# Altium PCB CCU-2.PcbDoc (part 1 of 3)
Units mm, origin at the board's own origin, x right, y up, seen from the top; angles counter-clockwise.
Board outline 52 x 56 mm, 4 copper layers (Top Layer, Int1 (GND), Int2 (PWR), Bottom Layer), stack 1.594 mm thick; 81 components, 50 nets, 261 pads, 97 vias.
Unrouted connection lines stored in the file: 64.
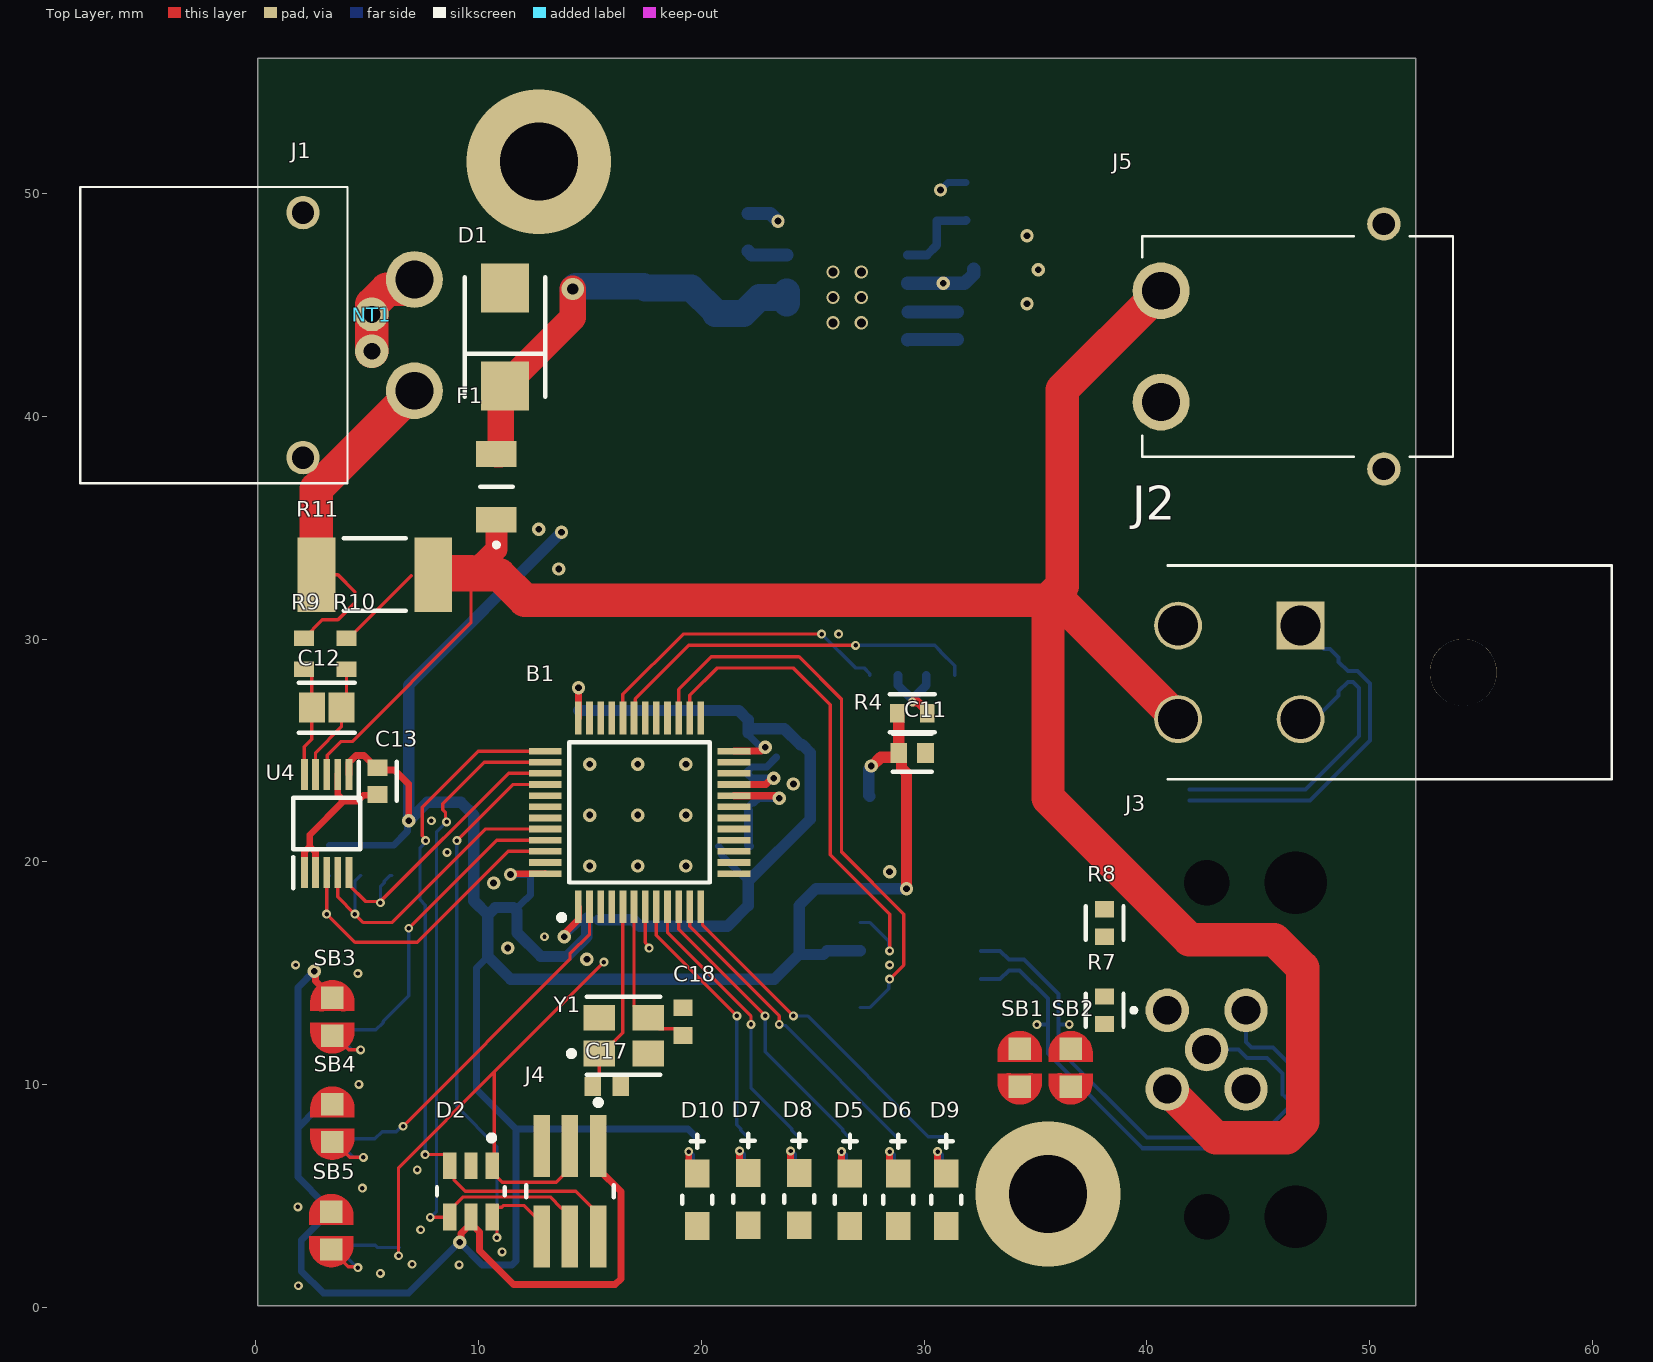
[diagram p0: Top Layer view]
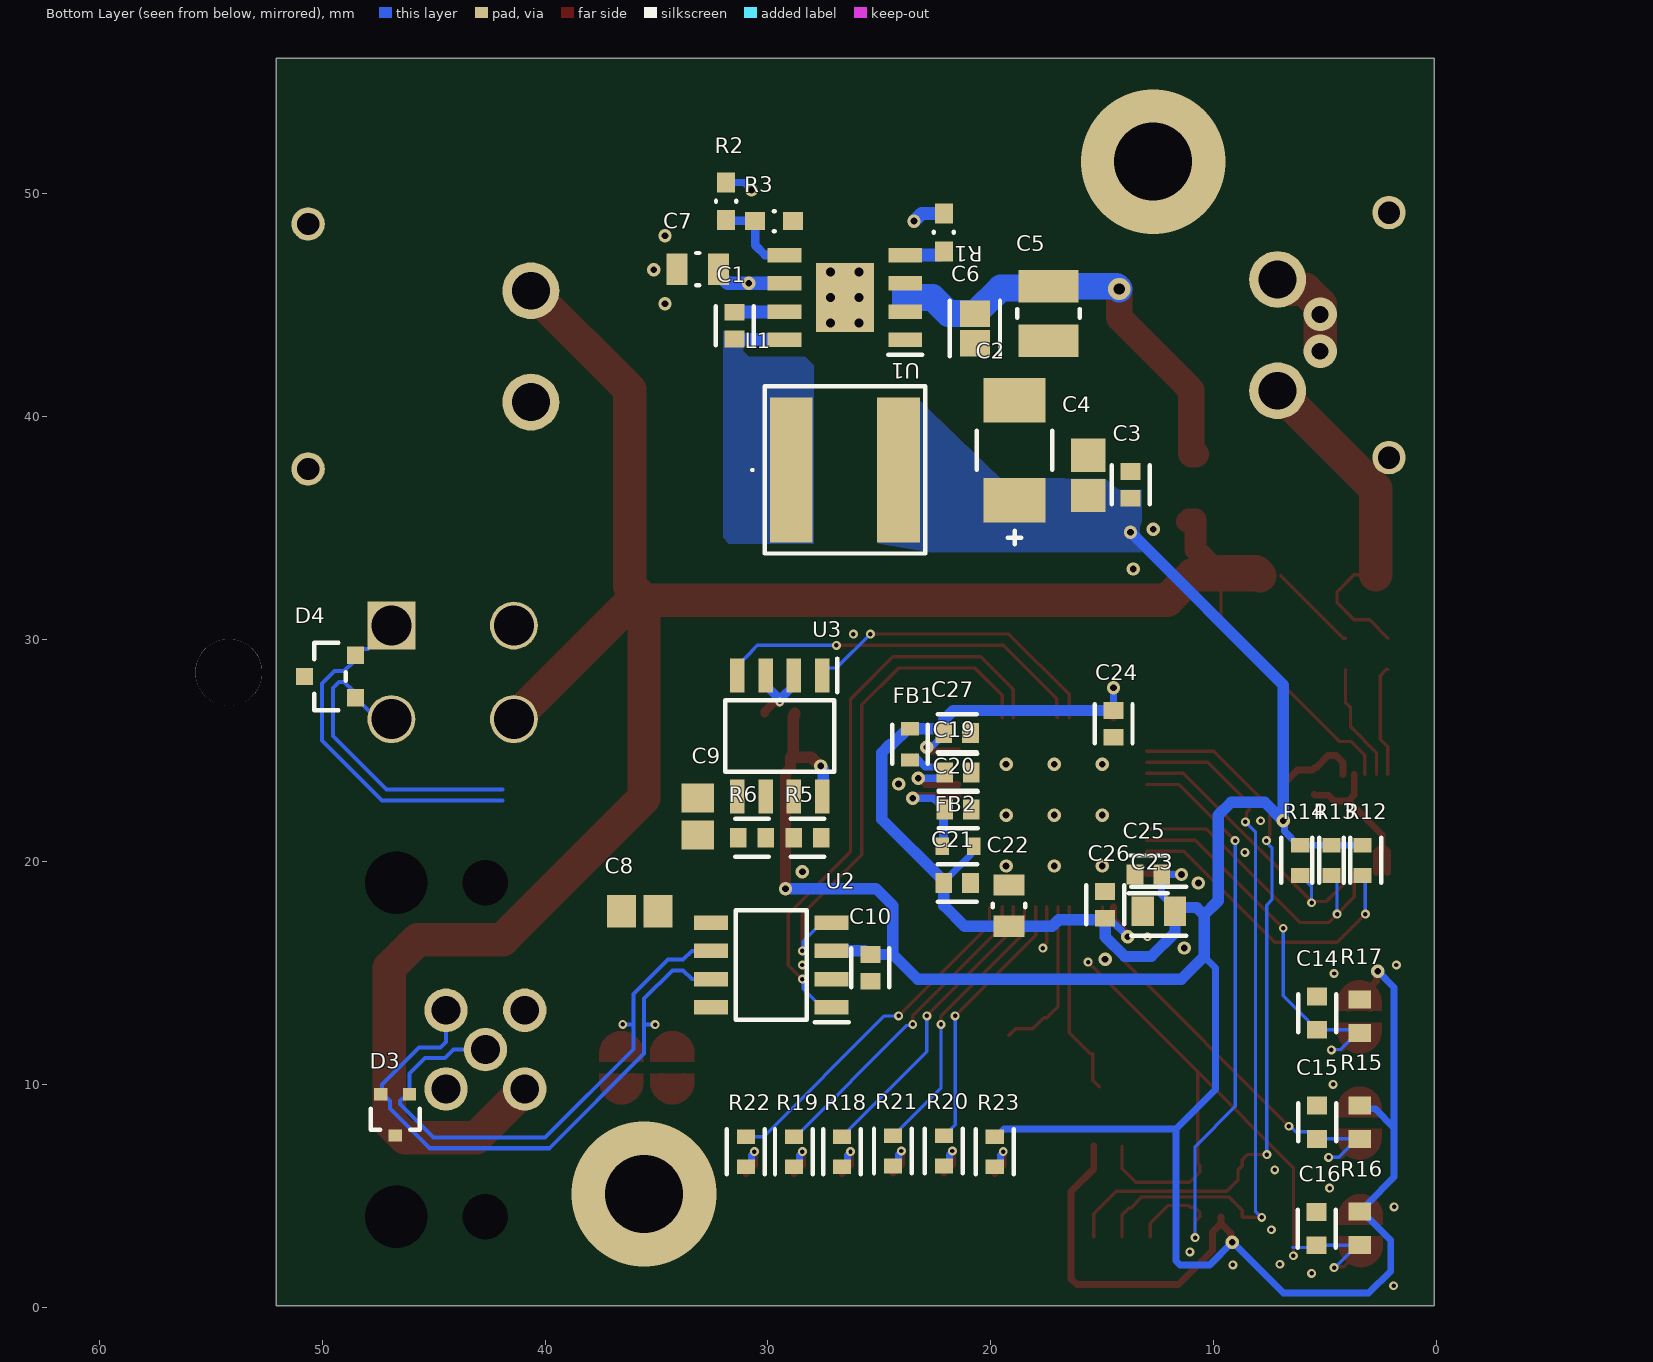
[diagram p1: Bottom Layer view, seen from below]
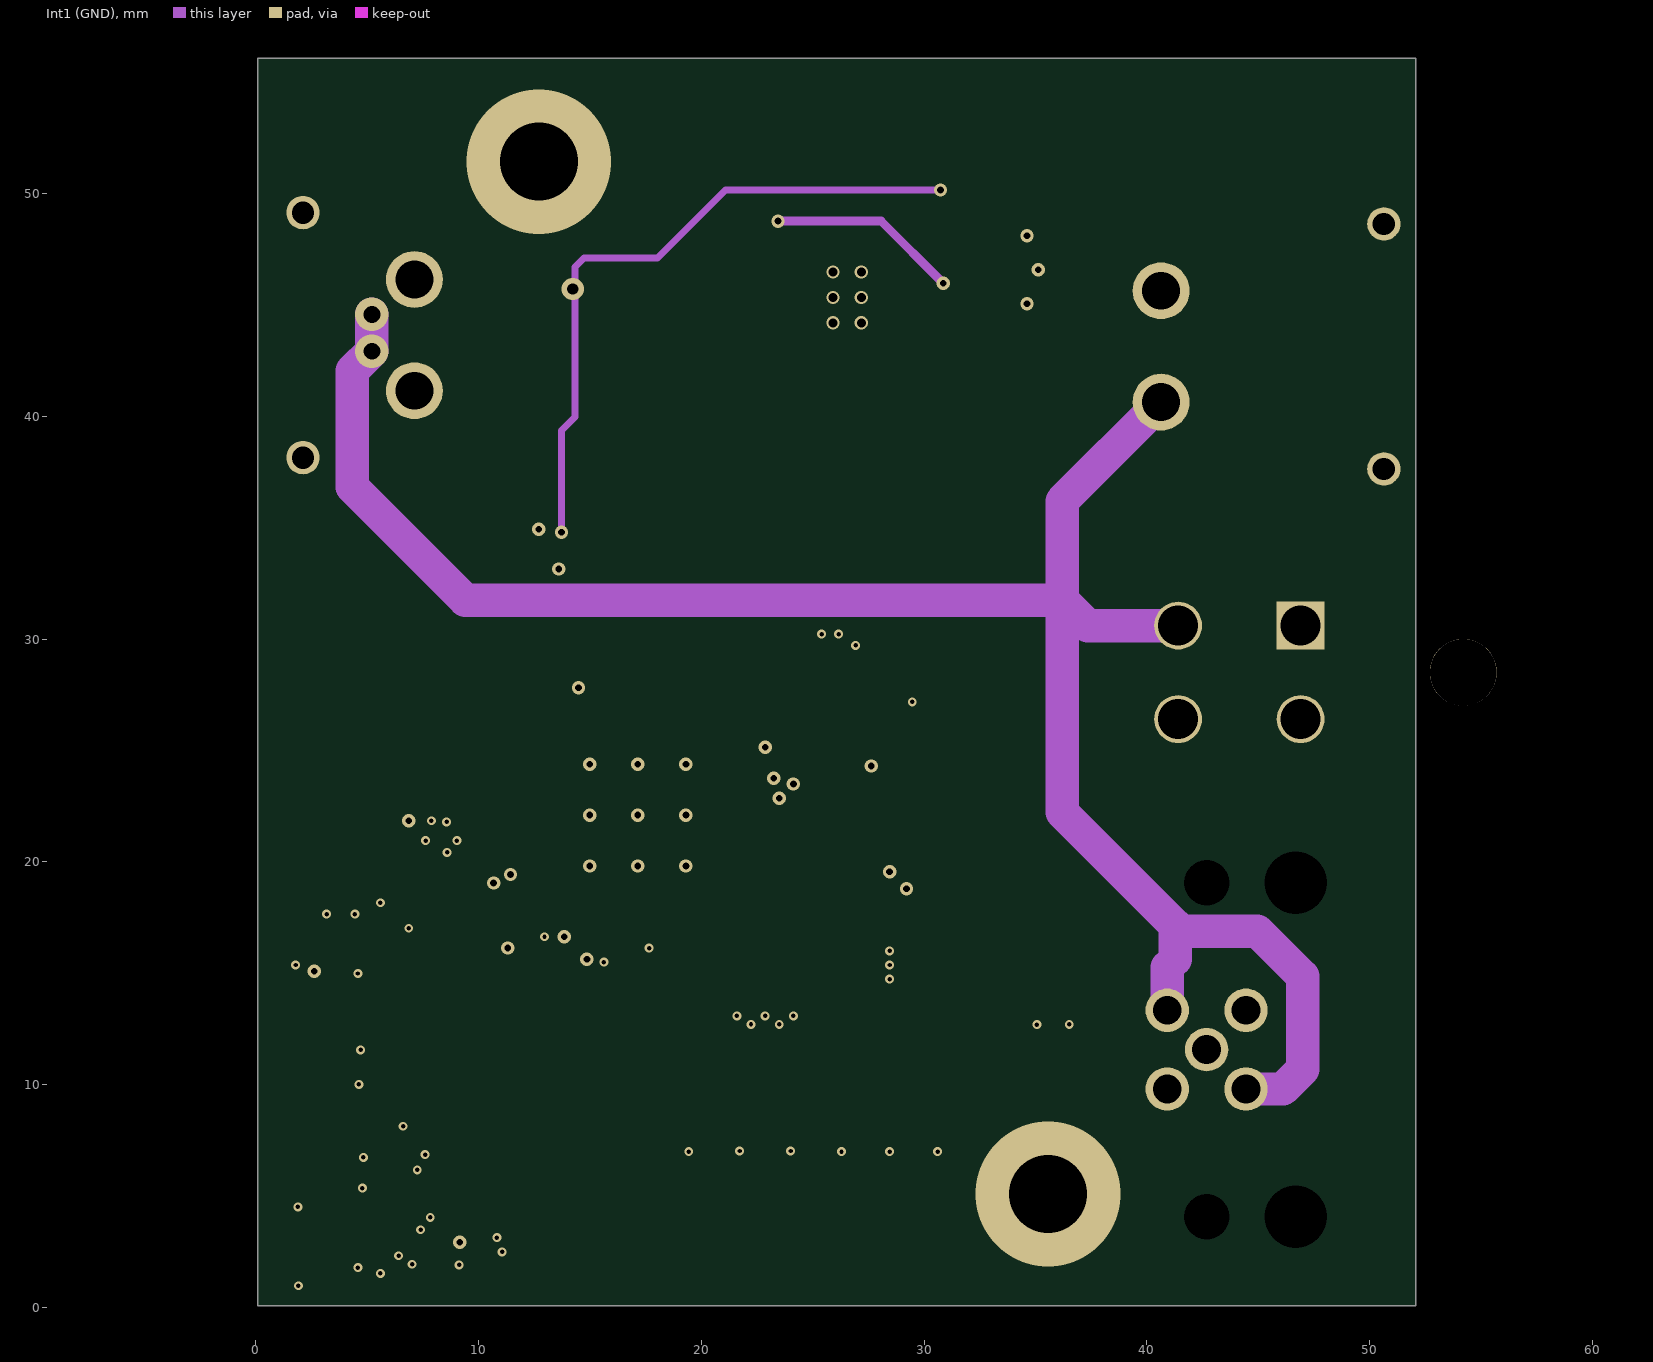
[diagram p2: Int1 (GND)]
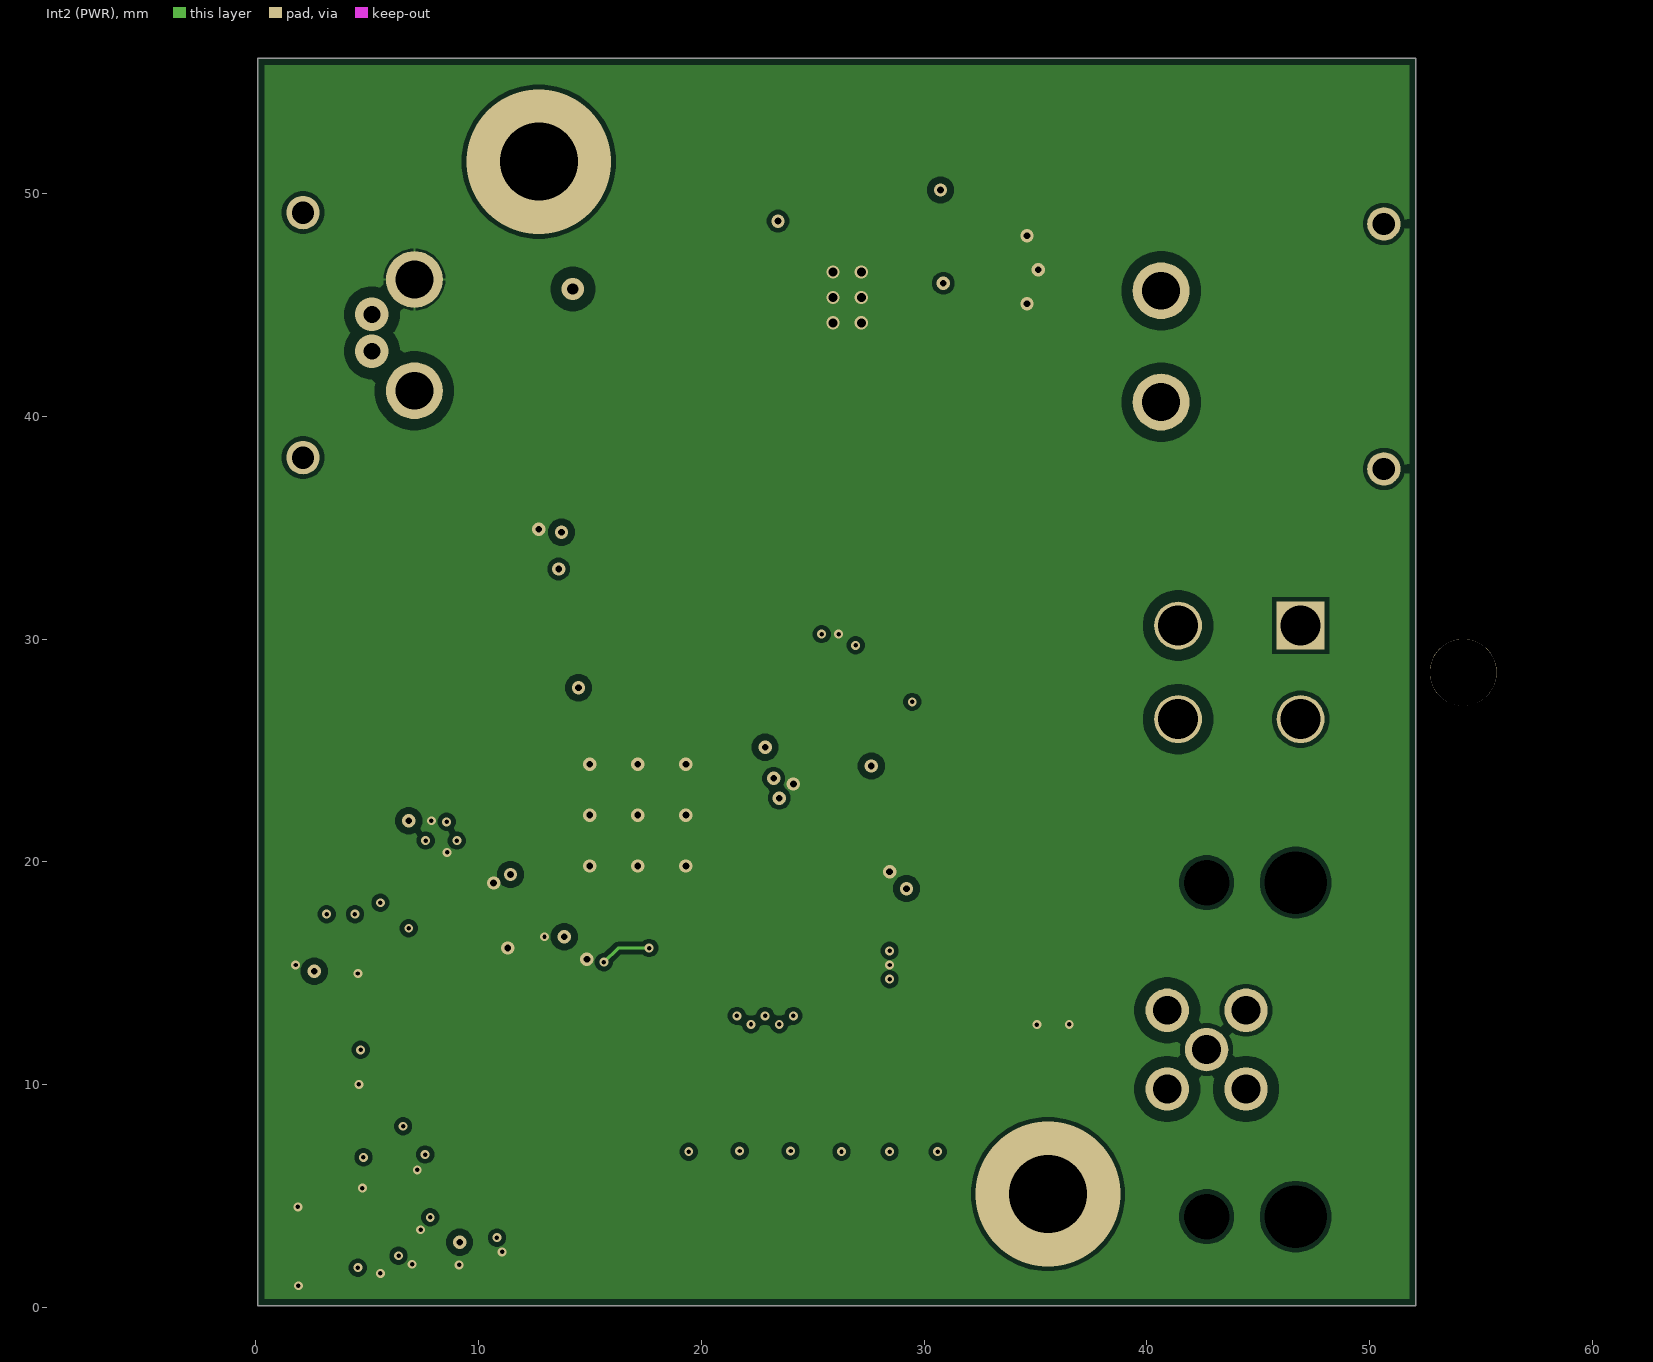
[diagram p3: Int2 (PWR)]
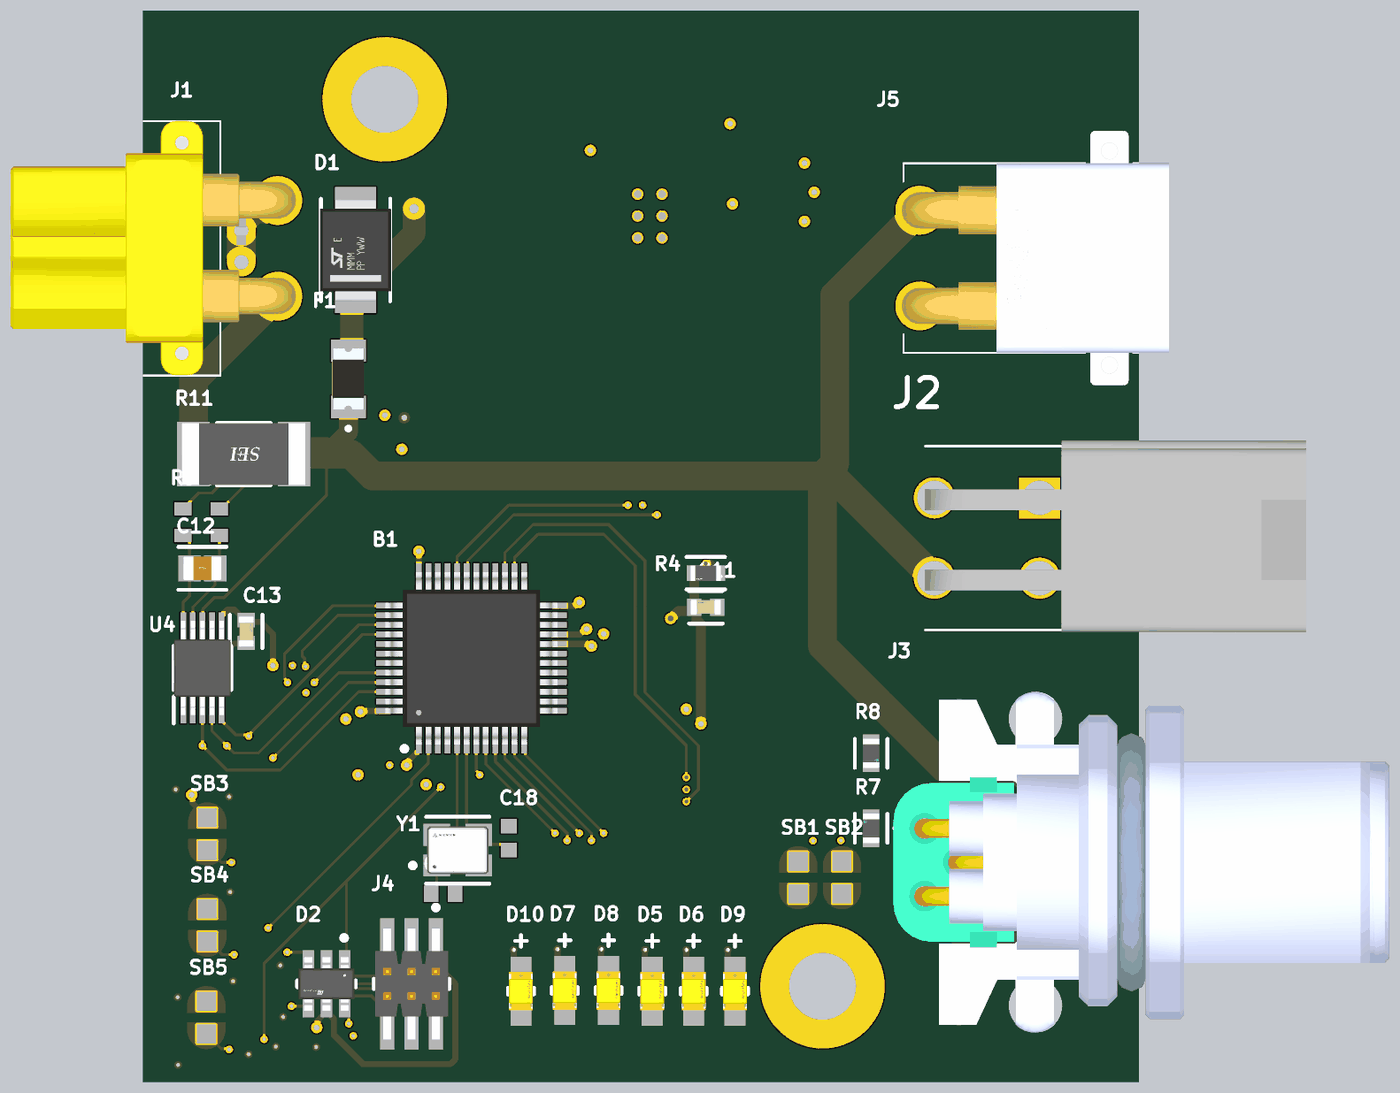
[diagram p5: 3D render of the assembled board from above, using the file's embedded part models]
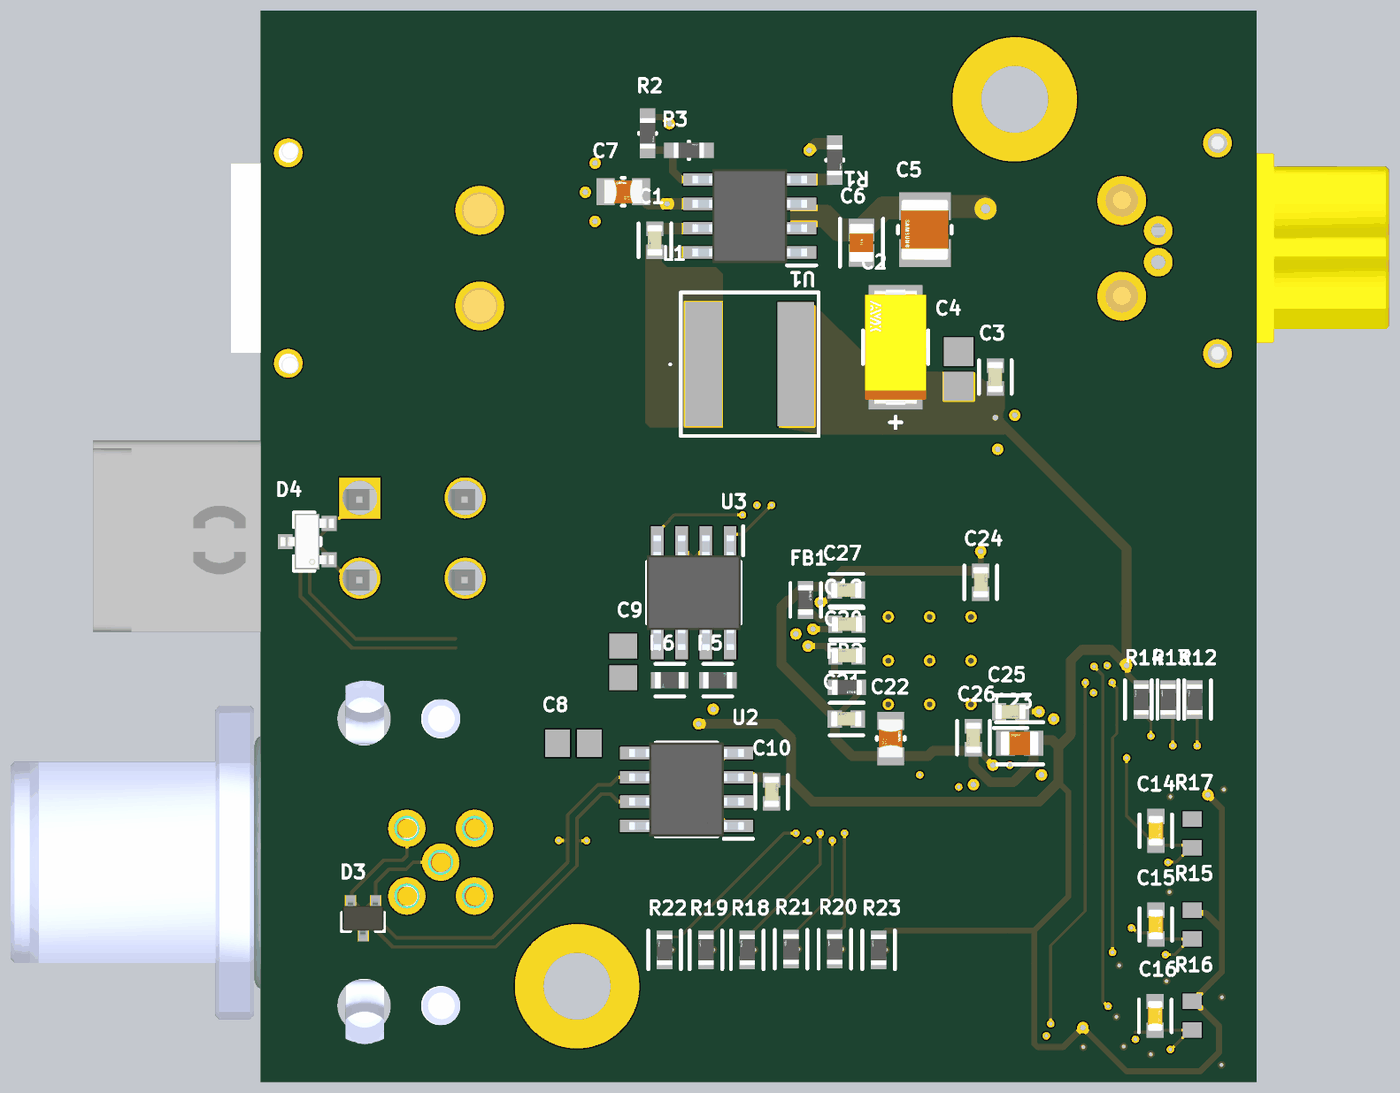
[diagram p6: 3D render of the assembled board from below, using the file's embedded part models]

## Layer stack, top to bottom
Top Solder: solder mask 0.0254, SM-001, Dk 4
Top Layer: signal copper 0.0351
Dielectric 1: prepreg 0.1067, PP-014, Dk 4.4
Dielectric 2: prepreg 0.1067, PP-014, Dk 4.4
Int1 (GND): signal copper 0.0152
Dielectric 3: core 1.0668, Core-042, Dk 4.6
Int2 (PWR): signal copper 0.0152
Dielectric 4: prepreg 0.1067, PP-014, Dk 4.4
Dielectric 5: prepreg 0.1067, PP-014, Dk 4.4
Bottom Layer: signal copper 0.0351
Bottom Solder: solder mask 0.0254, SM-001, Dk 4

## Board outline
0.077,0.077 0.077,56.077 52.077,56.077 52.077,0.077

## Design rules (kind name [scope] priority, off if disabled: settings)
BoardOutlineClearance [All] p1: gap=0.3 ignorepadtopadclearanceinfootprint=FALSE
Clearance "GND to 3V3 Clearence" [InNet('GND') vs InNet('+3V3')] p1: gap=0.3 ignorepadtopadclearanceinfootprint=TRUE
Clearance "GND to Power Clearance" [InNet('GND') vs (InNet('+12V')  OR InNet('+12V_EXT') OR InNet('+12V_ISO') OR InNet('GND_ISO'))] p2: gap=0.5 ignorepadtopadclearanceinfootprint=TRUE
Clearance "GND Clearance" [InNet('GND') vs Not ((InNet('+12V')  OR InNet('+12V_EXT')  OR InNet('+12V_ISO') OR InNet('GND_ISO')))] p3: gap=0.2 ignorepadtopadclearanceinfootprint=TRUE
Clearance "Power Clearence" [(InNet('+12V')  AND InNet('+12V_EXT')) vs InNet('+3V3')] p4: gap=0.4 ignorepadtopadclearanceinfootprint=TRUE
Clearance "Polygon to power Clearance" [InPolygon vs (InNet('+12V_EXT') OR InNet('+12V') OR  InNet('+3V3') OR InNet('GND'))] p5: gap=0.3 ignorepadtopadclearanceinfootprint=TRUE
ComponentClearance [All] p1: gap=0.102 collisioncheckmode=3 verticalgap=0.102 showdistances=TRUE
DiffPairsRouting "DIFF Class" [InDifferentialPairClass('DIFF')] p1: maxlimit=0.3 minlimit=0.28 mostfreqgap=0.3 toplayer_minwidth=0.18 toplayer_maxwidth=0.2 toplayer_prefwidth=0.2 midlayer1_minwidth=0.18 midlayer1_maxwidth=0.2 midlayer1_prefwidth=0.2 midlayer2_minwidth=0.18 midlayer2_maxwidth=0.2 midlayer2_prefwidth=0.2 bottomlayer_minwidth=0.18 bottomlayer_maxwidth=0.2 bottomlayer_prefwidth=0.2 maxuncoupledlength=12.7
DiffPairsRouting [All] p2: maxlimit=0.102 minlimit=0.102 mostfreqgap=0.102 toplayer_minwidth=0.102 toplayer_maxwidth=1816.048 toplayer_prefwidth=0.102 midlayer1_minwidth=0.102 midlayer1_maxwidth=1816.048 midlayer1_prefwidth=0.102 midlayer2_minwidth=0.102 midlayer2_maxwidth=1816.048 midlayer2_prefwidth=0.102 bottomlayer_minwidth=0.102 bottomlayer_maxwidth=1816.048 bottomlayer_prefwidth=0.102 maxuncoupledlength=12.7
Height [All] p1: minheight=0 maxheight=1816.048 prefheight=12.7
HoleSize [All] p1: absolutevalues=TRUE maxlimit=6.3 minlimit=0.2 maxpercent=80.000 minpercent=20.000
HoleToHoleClearance [All] p1: gap=0.25 allowstackedmicrovias=FALSE
MatchedLengths DiffPair_MatchedLengths [InDifferentialPairClass('DIFF')] p1: tolerance=25.4 checknetsindiffpair=FALSE checkdiffpairvsdiffpair=TRUE checkxsignals=TRUE checkothers=TRUE
MinimumAnnularRing [All] p1: minimumring=0.076
MinimumSolderMaskSliver [All] p1: minsoldermaskwidth=0
PlaneClearance [All] p1: clearance=0.3
PlaneConnect 3V3 [InNet('+3V3')] p1: planeconnectstyle=Direct reliefexpansion=0.508 reliefentries=4 reliefconductorwidth=0.254 reliefairgap=0.254
PlaneConnect PlaneConnectPowerPads [InPadClass('PowerPads')] p2: planeconnectstyle=Direct reliefexpansion=0.508 reliefentries=4 reliefconductorwidth=0.254 reliefairgap=0.254
PlaneConnect [All] p3: pad.planeconnectstyle=Relief pad.reliefexpansion=0.3 pad.reliefentries=4 pad.reliefconductorwidth=0.102 pad.reliefairgap=0.102 via.planeconnectstyle=Direct via.reliefexpansion=0.3 via.reliefentries=4 via.reliefconductorwidth=0.127 via.reliefairgap=0.127
PolygonConnect NetC1_1 [InNet('NetC1_1') vs InNet('NetC1_1')] p1: connectstyle=Direct reliefconductorwidth=0.254 reliefentries=4 polygonreliefangle="90 Angle" airgapwidth=0.254
PolygonConnect +3V3 [InNet('+3V3') vs InNet('+3V3')] p2: connectstyle=Direct reliefconductorwidth=0.254 reliefentries=4 polygonreliefangle="90 Angle" airgapwidth=0.254
PolygonConnect PolygonConnectPowerPads [All vs (InPadClass('PowerPads'))] p3: connectstyle=Direct reliefconductorwidth=0.254 reliefentries=4 polygonreliefangle="90 Angle" airgapwidth=0.254
PolygonConnect [All] p4: thpad.connectstyle=Relief thpad.reliefconductorwidth=0.102 thpad.reliefentries=4 thpad.polygonreliefangle="90 Angle" thpad.airgapwidth=0.102 smdpad.connectstyle=Relief smdpad.reliefconductorwidth=0.102 smdpad.reliefentries=4 smdpad.polygonreliefangle="90 Angle" smdpad.airgapwidth=0.102 via.connectstyle=Direct via.reliefconductorwidth=0.127 via.reliefentries=4 via.polygonreliefangle="90 Angle" via.airgapwidth=0.127
RoutingVias RoutingViasBasic [All] p1: holewidth=0.3 width=0.6 viastyle="Through Hole" minholewidth=0.2 minwidth=0.4 maxholewidth=0.5 maxwidth=1
SilkToSilkClearance [All] p1: silktosilkclearance=0
SilkToSolderMaskClearance [IsPad] p1: minsilkscreentomaskgap=0.102 clearancetoexposedcopper=TRUE
SolderMaskExpansion [All] p1: expansion=0.075 istentingtop=FALSE
SupplyNets "Schematic Supply Nets_5" [InNet('+12V_ISO')] p1: voltage=0.000
SupplyNets "Schematic Supply Nets_4" [InNet('GND_ISO')] p2: voltage=0.000
SupplyNets "Schematic Supply Nets_3" [InNet('+3V3')] p3: voltage=0.000
SupplyNets "Schematic Supply Nets_2" [InNet('+12V')] p4: voltage=0.000
SupplyNets "Schematic Supply Nets_1" [InNet('GND')] p5: voltage=0.000
SupplyNets "Schematic Supply Nets" [InNet('+12V_EXT')] p6: voltage=0.000
Width GND [InNet('GND')] p1: maxlimit=0.5 minlimit=0.2 preferedwidth=0.3
Width "3V3 Power" [InNet('+3V3')] p2: maxlimit=0.51 minlimit=0.31 preferedwidth=0.31
Width "12V Power" [(InNet('+12V') OR InNet('+12V_EXT'))] p3: maxlimit=1.2 minlimit=0.52 preferedwidth=0.62
Width Signal [Not (InNet('GND')) OR InNet('+12V') or InNet('+12V_EXT') or InNet('+3V3')] p4: maxlimit=0.39 minlimit=0.15 preferedwidth=0.19
Width [All] p5: maxlimit=1816.048 minlimit=0.102 preferedwidth=0.102
20 further rules are at their usual default settings.

## Classes and differential pairs
differential pair class DIFF: CAN RS485
component class CCU-2-MCU: B1 C14 C15 C16 C17 C18 C19 C20 C21 C22 C23 C24 C25 C26 C27 D5 D6 D7 D8 D9 D10 FB1 FB2 R15 R16 R17 R18 R19 R20 R21 R22 R23 SB3 SB4 SB5 Y1
component class CCU-2-inputs: D1 D2 F1 J1 J2 J3 J4 J5 NT1
component class CCU-2-ICs: C1 C2 C3 C4 C5 C6 C7 C8 C9 C10 C11 C12 C13 D3 D4 L1 R1 R2 R3 R4 R5 R6 R7 R8 R9 R10 R11 R12 R13 R14 SB1 SB2 U1 U2 U3 U4
differential pair RS485: +RS485_P -RS485_N
differential pair CAN: +CAN_P -CAN_N

## Components (designator, comment, footprint, x,y, rotation, side; value= is the part's Value field where it differs from the comment)
B1 "STM32G491CET6" STM32G491CET6 17.225,22.221 r90 top
C1 "100n" FP-C0603C-CF-MFG 31.496,44.069 r90 bottom value="0.10 μF"
C2 "100u" FP-TPSC-MFG 18.923,38.481 r270 bottom
C3 "100n" FP-C0603C-CF-MFG 13.716,36.922 r90 bottom value="0.10 μF"
C4 "1u" CAPC2013X140X50ML20T25 15.621,37.349 r270 bottom
C5 "10u" FP-CL32-IPC_C 17.399,44.622 r270 bottom
C6 "220n" FP-C2012-125-0_2-IPC_C 20.701,43.942 r270 bottom
C7 "1u" FP-CC0805-0_85-MFG 33.147,46.609 r0 bottom value="1 uF"
C8 "4n7" CAPC2013X145X48NL20T23 35.75,17.78 r180 bottom
C9 "4n7" CAPC2013X145X48NL20T23 33.147,22.034 r270 bottom
C10 "100n" FP-C0603C-CF-MFG 25.4,15.24 r270 bottom value="0.10 μF"
C11 "100n" FP-C0603C-CF-MFG 29.464,24.892 r0 top value="0.10 μF"
C12 "220n" FP-C2012-125-0_2-IPC_C 3.175,26.924 r0 top
C13 "100n" FP-C0603C-CF-MFG 5.461,23.622 r270 top value="0.10 μF"
C14 "10n" FP-CC0603-DA-MFG 5.334,13.208 r90 bottom value="10 nF"
C15 "10n" FP-CC0603-DA-MFG 5.334,8.309 r90 bottom value="10 nF"
C16 "10n" FP-CC0603-DA-MFG 5.361,3.532 r90 bottom value="10 nF"
C17 "10p" CAPC1608X90X35LL10T15 15.748,9.906 r180 top
C18 "10p" CAPC1608X90X35LL10T15 19.177,12.827 r270 top
C19 "100n" FP-C0603C-CF-MFG 21.463,24.003 r180 bottom value="0.10 μF"
C20 "100n" FP-C0603C-CF-MFG 21.463,22.352 r180 bottom value="0.10 μF"
C21 "100n" FP-C0603C-CF-MFG 21.498,19.05 r180 bottom value="0.10 μF"
C22 "1u" FP-CC0805-0_85-MFG 19.177,18.034 r90 bottom value="1 uF"
C23 "4u7" FP-GRM21B-0_15-IPC_C 12.446,17.78 r0 bottom
C24 "100n" FP-C0603C-CF-MFG 14.478,26.197 r270 bottom value="0.10 μF"
C25 "100n" FP-C0603C-CF-MFG 12.919,19.431 r0 bottom value="0.10 μF"
C26 "100n" FP-C0603C-CF-MFG 14.859,18.069 r90 bottom value="0.10 μF"
C27 "100n" FP-C0603C-CF-MFG 21.498,25.781 r180 bottom value="0.10 μF"
D1 "SMBJ22A" SMBJ22A 11.176,43.561 r90 top
D2 "USBLC6-4SC6" FP-SOT23-6L-MFG 9.652,5.207 r270 top value=3pF
D3 "ESDCAN04-2BWY" ESDCAN04-2BWY 46.736,8.636 r270 bottom value=17pF
D4 "SM712-02HTG" FP-SM712-MFG 49.657,28.321 r0 bottom value=75pF
D5 "R_RS" FP-APT2012MGC-MFG 26.67,4.826 r270 top
D6 "G_RS" FP-APT2012MGC-MFG 28.829,4.826 r270 top
D7 "R_CAN" FP-APT2012MGC-MFG 22.098,4.858 r270 top
D8 "G_CAN" FP-APT2012MGC-MFG 24.384,4.858 r270 top
D9 "G_STAT" FP-APT2012MGC-MFG 30.988,4.826 r270 top
D10 "G_PWR" FP-APT2012MGC-MFG 19.812,4.826 r270 top
F1 "1206L050/24WR" 1206L075132WR 10.795,36.83 r90 top value=150mΩ
FB1 "MPZ1608S601ATA00" FP-MPZ1608-0_8-MFG 23.622,25.273 r90 bottom
FB2 "MPZ1608S601ATA00" FP-MPZ1608-0_8-MFG 21.463,20.701 r180 bottom
J1 "XT30PW-F" XT30PWF 7.112,41.148 r90 top
J2 "39-30-1040" 39-30-1040 46.902,30.607 r90 top
J3 "M12A-05PMMR-SF7003" M12A05PMMRSF7003 40.914,13.335 r90 top
J4 "FTSH-103" FP-FTSH-103-01-L-DV-TR-MFG 14.097,5.207 r180 top
J5 "XT30PW-M" XT30PWM 46.552,43.14 r270 top
L1 "5.6uH" XAL7070472MEC 26.543,37.592 r180 bottom value=4.7µH
NT1 "NT" NetTie_SMD 5.207,44.577 r270 top net-tie
R1 "100k" FP-RC0603-0_55-MFG 22.098,48.26 r270 bottom
R2 "100k" FP-RC0603-0_55-MFG 31.877,49.657 r270 bottom
R3 "43.2k" FP-RC0603-0_55-MFG 29.718,48.768 r180 bottom
R4 "10k" FP-RC0603-0_55-IPC_C 29.464,26.67 r180 top
R5 "60R4" FP-CRCW0603-e3-IPC_C 28.214,21.082 r180 bottom
R6 "60R4" FP-CRCW0603-e3-IPC_C 30.714,21.082 r0 bottom
R7 "60R4" FP-CRCW0603-e3-IPC_C 38.1,13.335 r90 top
R8 "60R4" FP-CRCW0603-e3-IPC_C 38.1,17.252 r270 top
R9 "10" RESC1608X55X25NL10T15 2.159,29.337 r90 top
R10 "10" RESC1608X55X25NL10T15 4.064,29.337 r90 top
R11 "10m" FP-CSRF2512-IPC_C 5.334,32.893 r180 top
R12 "10k" FP-RC0603-0_55-IPC_C 3.302,20.066 r90 bottom
R13 "10k" FP-RC0603-0_55-IPC_C 4.699,20.066 r90 bottom
R14 "10k" FP-RC0603-0_55-IPC_C 6.096,20.066 r90 bottom
R15 "10k" RESC1608X55X25ML10T15 3.429,8.309 r90 bottom
R16 "10k" RESC1608X55X25ML10T15 3.429,3.544 r90 bottom
R17 "10k" RESC1608X55X25ML10T15 3.429,13.069 r270 bottom
R18 "1k" FP-RC0603-0_55-IPC_C 26.67,6.985 r90 bottom
R19 "1k" FP-RC0603-0_55-IPC_C 28.829,6.985 r90 bottom
R20 "1k" FP-RC0603-0_55-IPC_C 22.098,7.017 r90 bottom
R21 "1k" FP-RC0603-0_55-IPC_C 24.384,7.017 r90 bottom
R22 "1k" FP-RC0603-0_55-IPC_C 30.988,6.985 r90 bottom
R23 "1k" FP-RC0603-0_55-IPC_C 19.812,6.985 r90 bottom
SB1 "Solder_Bridge" "Solder Bridge"#1 34.29,11.006 r270 top
SB2 "Solder_Bridge" "Solder Bridge"#1 36.576,11.006 r270 top
SB3 "Solder_Bridge" "Solder Bridge"#2 3.429,13.292 r270 top
SB4 "Solder_Bridge" "Solder Bridge"#1 3.429,8.02 r90 top
SB5 "Solder_Bridge" "Solder Bridge"#1 3.379,3.194 r90 top
U1 "LMR33630ADDAR" LMR33630ADDAR 26.543,45.339 r0 bottom
U2 "TCAN332GDR" SOIC127P600X175-8N 29.845,15.367 r0 bottom
U3 "THVD1406DR" SOIC127P600X175-8N 29.464,25.654 r270 bottom
U4 "INA238AIDGSR" INA238AIDGSR 3.175,21.717 r90 top
Y1 "ABM8W-24.0000MHZ-8-D1X-T3" FP-ABM8W-MFG 16.51,12.192 r0 top

## Footprints (in the part's own frame and the unit in brackets; to place one, negate y for a bottom-side part, rotate by r counter-clockwise, add the part's x,y. Pads: shape width x height; smd on the part's side, far side on the other; paste and mask are expansions set on the pad)
39-30-1040 [mm]
  rect 2.15x2.15 hole 1.8: 1(0,0)
  round 2.15 hole 1.8: 2(-4.2,0) 3(0,5.5) 4(-4.2,5.5)
  round 3 hole 3 unplated: 5(-2.1,-7.3)
  silkscreen extent -6.9,-13.97 2.7,5.97, body extent -7,-13.93 3,6.01, height 11.39
1206L075132WR [mm]
  rect 1.16x1.82 smd: 1(-1.475,0) 2(1.475,0)
  silkscreen extent -2.7,-0.72 0,0.72, body extent -1.6,-0.83 1.6,0.83, height 1.25
CAPC1608X90X35LL10T15 [mm] "Chip Capacitor, 2-Leads, Body 1.60x0.80mm, IPC High Density"
  rect 0.75x0.85 smd: 1(-0.625,0) 2(0.625,0)
  body extent -0.85,-0.45 0.85,0.45, height 0.9
CAPC2013X140X50ML20T25 [mm] "Chip Capacitor, 2-Leads, Body 2.00x1.25mm, IPC Low Density"
  rect 1.5x1.55 smd: 1(-0.9,0) 2(0.9,0)
  body extent -1.1,-0.72 1.1,0.72, height 1.4
CAPC2013X145X48NL20T23 [mm] "Chip Capacitor, 2-Leads, Body 2.00x1.25mm, IPC Medium Density"
  rect 1.3x1.45 smd: 1(-0.825,0) 2(0.825,0)
  body extent -1.1,-0.72 1.1,0.72, height 1.45
ESDCAN04-2BWY [mm]
  rect 0.55x0.6 smd paste-1000 mask+0: 1(-0.925,0.65) 2(-0.925,-0.65) 3(0.925,0)
  silkscreen extent -0.28,-1.1 0.67,1.1, body extent -1.04,-1.07 1.06,1.07, height 1.13
FP-ABM8W-MFG [mm]
  rect 1.4x1.15 smd paste+0 mask+0: 1(-1.1,-0.8) 2(1.1,-0.8) 3(1.1,0.8) 4(-1.1,0.8)
  silkscreen extent -2.47,-1.75 1.65,1.75, body extent -1.9,-1.48 1.9,1.48, height 0.25
FP-APT2012MGC-MFG [mm]
  rect 1.25x1.1 smd paste+0 mask+0: 1(-1.175,0) 2(1.175,0)
  silkscreen extent -2.93,-0.67 0.18,0.67, body extent -1.9,-0.77 1.9,0.77, height 0.25
FP-C0603C-CF-MFG [mm]
  rect 0.75x0.9 smd paste+0 mask+0: 1(-0.6,0) 2(0.6,0)
  silkscreen extent -0.87,-0.85 0.88,0.85, body extent -0.8,-0.4 0.8,0.4, height 0.87
FP-C2012-125-0_2-IPC_C [mm]
  rect 1.178x1.356 smd paste+0 mask+0: 1(-0.664,0) 2(0.664,0)
  silkscreen extent -1.25,-1.12 1.25,1.12, body extent -1,-0.63 1,0.63, height 1.45
FP-CC0603-DA-MFG [mm]
  rect 0.8x0.9 smd paste+0 mask+0: 1(-0.75,0) 2(0.75,0)
  silkscreen extent -0.85,-0.85 0.85,0.85, body extent -0.8,-0.4 0.8,0.4, height 0.9
FP-CC0805-0_85-MFG [mm]
  rect 0.95x1.4 smd paste+0 mask+0: 1(-0.925,0) 2(0.925,0)
  silkscreen extent -0.08,-0.72 0.08,0.72, body extent -1,-0.63 1,0.63, height 0.95
FP-CL32-IPC_C [mm]
  rect 1.453x2.704 smd paste+0 mask+0: 1(-1.225,0) 2(1.225,0)
  silkscreen extent -0.2,-1.4 0.2,1.4, body extent -1.6,-1.25 1.6,1.25, height 2.8
FP-CRCW0603-e3-IPC_C [mm]
  rect 0.735x0.862 smd paste+0 mask+0: 1(-0.615,0) 2(0.615,0)
  silkscreen extent -0.75,-0.85 0.75,0.85, body extent -0.77,-0.43 0.77,0.43, height 0.5
FP-CSRF2512-IPC_C [mm]
  rect 1.705x3.356 smd paste+0 mask+0: 1(-2.626,0) 2(2.626,0)
  silkscreen extent -1.4,-1.63 1.4,1.63, body extent -3.58,-1.83 3.58,1.83, height 0.25
FP-FTSH-103-01-L-DV-TR-MFG [mm]
  rect 0.74x2.79 smd paste+0 mask+0: 1(-1.27,-2.035) 2(-1.27,2.035) 3(0,-2.035) 4(0,2.035) 5(1.27,-2.035) 6(1.27,2.035)
  silkscreen extent -1.97,-4.11 1.97,0.27, body extent -2.07,-3.53 2.07,3.53, height 0.25
FP-GRM21B-0_15-IPC_C [mm]
  rect 1.006x1.308 smd paste+0 mask+0: 1(-0.726,0) 2(0.726,0)
  silkscreen extent -1.23,-1.1 1.23,1.1, body extent -1,-0.63 1,0.63, height 1.4
FP-MPZ1608-0_8-MFG [mm]
  rect 0.6x0.8 smd paste+0 mask+0: 1(-0.7,0) 2(0.7,0)
  silkscreen extent -0.87,-0.8 0.87,0.8, body extent -0.8,-0.4 0.8,0.4, height 0.95
FP-RC0603-0_55-IPC_C [mm]
  rect 0.659x0.812 smd paste+0 mask+0: 1(-0.677,0) 2(0.677,0)
  silkscreen extent -1.01,-0.85 1.01,0.85, body extent -0.8,-0.4 0.8,0.4, height 0.55
FP-RC0603-0_55-MFG [mm]
  rect 0.9x0.8 smd paste+0 mask+0: 1(-0.85,0) 2(0.85,0)
  silkscreen extent -0.03,-0.45 0.03,0.45, body extent -0.8,-0.4 0.8,0.4, height 0.55
FP-SM712-MFG [mm]
  rect 0.78x0.78 smd paste+0 mask+0: 1(-1.145,0.95) 2(-1.145,-0.95) 3(1.145,0)
  silkscreen extent -0.7,-1.52 0.7,1.52, body extent -1.4,-1.45 1.4,1.45, height 1.3
FP-SOT23-6L-MFG [mm]
  rect 1.2x0.6 smd paste+0 mask+0: 1(-1.15,0.95) 2(-1.15,0) 3(-1.15,-0.95) 4(1.15,-0.95) 5(1.15,0) 6(1.15,0.95)
  silkscreen extent -2.52,-1.53 0.18,1.53, body extent -1.85,-1.63 1.85,1.63, height 0.25
FP-TPSC-MFG [mm]
  rect 2x2.8 smd paste+0 mask+0: 1(-2.25,0) 2(2.25,0)
  silkscreen extent -0.87,-1.7 4.23,1.7, body extent -3,-1.6 3,1.6, height 2.8
INA238AIDGSR [mm]
  rect 1.4x0.3 smd: 1(-2.2,1) 2(-2.2,0.5) 3(-2.2,0) 4(-2.2,-0.5) 5(-2.2,-1) 6(2.2,-1) 7(2.2,-0.5) 8(2.2,0) 9(2.2,0.5) 10(2.2,1)
  silkscreen extent -2.9,-1.5 1.15,1.5, body extent -2.46,-1.5 2.46,1.5, height 1.1
LMR33630ADDAR [mm]
  rect 1.525x0.65 smd: 1(-2.712,1.905) 2(-2.712,0.635) 3(-2.712,-0.635) 4(-2.712,-1.905) 5(2.712,-1.905) 6(2.712,-0.635) 7(2.712,0.635) 8(2.712,1.905)
  rect 2.6x3.1 smd: 9(0,0)
  silkscreen extent -3.47,2.58 -1.95,2.58, body extent -3,-2.45 3,2.45, height 1.7
M12A05PMMRSF7003 [mm]
  round 1.95 hole 1.3: 1(0,0) 2(-3.536,0) 3(-3.536,-3.536) 4(0,-3.536) 5(-1.768,-1.768)
  round 1.025 hole 2.05 unplated: 6(5.732,-1.768) 7(-9.268,-1.768)
  round 1.4 hole 2.8 unplated: 8(-9.268,-5.768) 9(5.732,-5.768)
  silkscreen extent -0.1,1.4 0.1,1.6, body extent -11.38,-24.23 7.82,1.65, height 16.39
NetTie_SMD [mm]
  rect 0.5x0.5 smd mask-10: 1(-0.45,0) 2(0.5,0)
  Top Layer region: -0.451,-0.251 0.499,-0.251 0.499,0.249 -0.451,0.249
RESC1608X55X25ML10T15 [mm] "Chip Resistor, 2-Leads, Body 1.60x0.80mm, IPC Low Density"
  rect 0.8x1 smd: 1(-0.75,0) 2(0.75,0)
  body extent -0.85,-0.45 0.85,0.45, height 0.55
RESC1608X55X25NL10T15 [mm] "Chip Resistor, 2-Leads, Body 1.70x0.90mm, IPC Medium Density"
  rect 0.7x0.9 smd: 1(-0.7,0) 2(0.7,0)
  body extent -0.85,-0.45 0.85,0.45, height 0.55
SMBJ22A [mm]
  rect 2.2x2.15 smd: 1(-2.2,0) 2(2.2,0)
  silkscreen extent -2.68,-1.81 2.68,1.81, body extent -2.68,-1.86 2.68,1.86, height 2.33
SOIC127P600X175-8N [mm]
  rect 1.525x0.65 smd: 1(-2.712,1.905) 2(-2.712,0.635) 3(-2.712,-0.635) 4(-2.712,-1.905) 5(2.712,-1.905) 6(2.712,-0.635) 7(2.712,0.635) 8(2.712,1.905)
  silkscreen extent -3.47,-2.45 1.6,2.58, body extent -3,-2.45 3,2.45, height 1.75
"Solder Bridge"#1 [mm]
  rect 1x1 smd: 1(-0.6,0) 2(1.1,0)
  Top Layer region: -0.501,-1 -0.001,-1 -0.001,1 -0.501,1
  Top Layer region: -1,-0.5 -0.5,-0.5 -0.5,0.5 -1,0.5
  Top Layer region: 1,0.999 0.5,0.999 0.5,-1.001 1,-1.001
  Top Layer region: 1.5,0.5 1,0.5 1,-0.5 1.5,-0.5
  Top Layer lines w1: 0.998,-0.49 ccw(c0.9,0) 0.998,0.49 ; -0.498,-0.49 cw(c-0.4,0) -0.498,0.49
"Solder Bridge"#2 [mm]
  rect 1x1 smd: 1(-0.6,0) 2(1.1,0)
  Top Layer region: -0.501,-1 -0.001,-1 -0.001,1 -0.501,1
  Top Layer region: -1,-0.5 -0.5,-0.5 -0.5,0.5 -1,0.5
  Top Layer region: 1,0.999 0.5,0.999 0.5,-1.001 1,-1.001
  Top Layer region: 1.5,0.5 1,0.5 1,-0.5 1.5,-0.5
  Top Layer lines w1: 0.998,-0.49 ccw(c0.9,0) 0.998,0.49 ; -0.498,-0.49 cw(c-0.4,0) -0.886,-0.116 cw(c-0.4,0) -0.498,0.49
STM32G491CET6 [mm]
  rect 1.475x0.3 smd: 1(-4.238,2.75) 2(-4.238,2.25) 3(-4.238,1.75) 4(-4.238,1.25) 5(-4.238,0.75) 6(-4.238,0.25) 7(-4.238,-0.25) 8(-4.238,-0.75) 9(-4.238,-1.25) 10(-4.238,-1.75) 11(-4.238,-2.25) 12(-4.238,-2.75) 25(4.238,-2.75) 26(4.238,-2.25) 27(4.238,-1.75) 28(4.238,-1.25) 29(4.238,-0.75) 30(4.238,-0.25) 31(4.238,0.25) 32(4.238,0.75) 33(4.238,1.25) 34(4.238,1.75) 35(4.238,2.25) 36(4.238,2.75)
  rect 0.3x1.475 smd: 13(-2.75,-4.238) 14(-2.25,-4.238) 15(-1.75,-4.238) 16(-1.25,-4.238) 17(-0.75,-4.238) 18(-0.25,-4.238) 19(0.25,-4.238) 20(0.75,-4.238) 21(1.25,-4.238) 22(1.75,-4.238) 23(2.25,-4.238) 24(2.75,-4.238) 37(2.75,4.238) 38(2.25,4.238) 39(1.75,4.238) 40(1.25,4.238) 41(0.75,4.238) 42(0.25,4.238) 43(-0.25,4.238) 44(-0.75,4.238) 45(-1.25,4.238) 46(-1.75,4.238) 47(-2.25,4.238) 48(-2.75,4.238)
  silkscreen extent -4.85,-3.15 3.15,3.62, body extent -4.5,-4.5 4.5,4.5, height 1.6
XAL7070472MEC [mm]
  rect 1.92x6.5 smd: 1(-2.41,0) 2(2.41,0)
  silkscreen extent -4.2,-3.75 3.6,3.75
XT30PWF [mm]
  round 2.55 hole 1.7: 1(0,0) 2(5,0)
  round 1.5 hole 1: 3(-3,5) 4(8,5)
  silkscreen extent -4.15,3 9.15,15, body extent -4.14,-0.94 9.16,13.95, height 5
XT30PWM [mm]
  round 2.55 hole 1.7: 1(-2.5,-5.912) 2(2.5,-5.912)
  round 1.5 hole 1: 3(5.5,4.088) 4(-5.5,4.088)
  silkscreen extent -4.95,-6.76 4.95,7.19, body extent -6.65,-6.86 6.65,7.09, height 5.1

## Part data
B1: "ARM Microcontrollers - MCU Mainstream Arm Cortex-M4+ MCU 170MHz with 512Kbytes of Flash memory", Supplier Part Number 1=497-STM32G491CET6-ND, Supplier 1=DigiKey
C1 C3 C10 C11 C13 C19 C20 C21 C24 C25 C26 C27: library part CMP-2006-03057-2, "CAP CER 0.1UF 25V X7R 0603", Capacitance="0.10 μF", Manufacturer=KEMET, Manufacturer Part Number=C0603C104K3RACTU, Package=C0603C-CF, Temperature="-55°C to +125°C", Temperature Characteristic=X7R, Temperature Coefficient=30ppm/°C, Temperature Range High=+125°C, Temperature Range Low=-55°C, Tolerance=0.1, Voltage Rating="25 V", Automotive=Yes, Automotive Grade="Grade 1", Category=Cap, ComponentLink2Description=Datasheet, ComponentLink2URL=https://api.kemet.com/component-edge/download/datasheet/C0603C100J5GACAUTO.pdf, Device Class L1="Passive Components", Device Class L2=Capacitors, Device Class L3="Ceramic Capacitors", Digikey Description="CAP CER 0.1UF 25V X7R 0603", Height=0.87mm, Lead Free=Yes, Material=Ceramic, Mouser Description="Multilayer Ceramic Capacitors MLCC - SMD/SMT 25volts 0.1uF X7R 10%", Octopart=https://octopart.com/c0603c104k3ractu-kemet-127541, RoHS=TRUE
C2: library part CMP-2000-07294-2, "CAP TANT 100UF 10% 10V 2312", Capacitance=100uF, Case Code (Imperial)=2412, Case Code (Metric)=6032, Case/Package=6032-28, Dielectric Material=Tantalum, ESR (Equivalent Series Resistance)=100mR, Leakage Current=10uA, Max Operating Temperature=125°C, Min Operating Temperature=-55°C, Package Quantity=1, Tolerance=10%, Voltage=10V, Construction=Flat, Depth=3.2mm, Dissipation Factor=8%, Features="General Purpose", Height=2.6mm, Height - Seated (Max)=0.11inch, Lead Free="Lead Free", Lead Pitch=2.9mm, Length=6mm, Mount="Surface Mount", Number of Pins=2, Packaging="Tape and Reel", Polarity=Polar, Radiation Hardening=No, REACH SVHC="No SVHC", RoHS Compliant=Yes, Series=TPS, Size=2.6mm, Termination=SMD/SMT, Voltage Rating=10V, Voltage Rating (DC)=10V, Width=3.2mm
C4: library part CMP-2007-04671-1, Manufacturer="AVX Interconnect / Elco", Part Number=0805ZC105JAT2A
C5: library part CMP-2000-06110-2, "Cap Ceramic 10uF 50V X7R ±10% SMD 1210 +125°C Embossed T/R", Capacitance=10uF, Case Code (Imperial)=1210, Case Code (Metric)=3225, Dielectric=X7R, Max Operating Temperature=125°C, Min Operating Temperature=-55°C, Package Quantity=1, Tolerance=10%, Voltage=50V, Case/Package=1210, Depth=2.5mm, Height=2.5mm, Lead Free="Lead Free", Length=3.2mm, Material=Ceramic, Mount="Surface Mount", Packaging="Tape and Reel", Radiation Hardening=No, Thickness=0.106inch, Voltage Rating=50V, Voltage Rating (DC)=50V, Width=0.098inch
C6 C12: library part CMP-08246-004834-1, "Multilayer Ceramic Capacitors 220nF ±10% 50V X7R SMD 0805", Capacitance=220nF, Case Code (Imperial)=0805, Case Code (Metric)=2012, Dielectric=X7R, Dielectric Material=Ceramic, Max Operating Temperature=125°C, Min Operating Temperature=-55°C, Package Quantity=1, Tolerance=10%, Voltage=50V, Case/Package=0805, Construction=Flat, Depth=1.25mm, Height=1.25mm, Lead Free="Lead Free", Length=2mm, Mount="Surface Mount", Number of Pins=2, Packaging="Tape and Reel", Radiation Hardening=No, REACH SVHC="No SVHC", Resistor Type=Ceramic, RoHS Compliant=Yes, Series=C, Termination=SMD/SMT, Thickness=0.057inch, Voltage Rating=50V, Voltage Rating (DC)=50V, Weight=0.000194oz, Width=0.049inch
C7 C22: library part CMP-2100-03605-2, "CAP CER 1UF 25V X7R 0805", Capacitance="1 uF", Manufacturer=Yageo, Manufacturer Part Number=CC0805KKX7R8BB105, Package=CC0805-0.85, Temperature="-30°C to +85°C", Temperature Characteristic=X7R, Temperature Range High=+85°C, Temperature Range Low=-30°C, Tolerance=0.1, Voltage Rating="25 V", Automotive=No, Category=Cap, ComponentLink2Description=Datasheet, ComponentLink2URL=http://www.yageo.com/documents/recent/UPY-GPHC_Y5V_6.3V-to-50V_8.pdf, Device Class L1="Passive Components", Device Class L2=Capacitors, Device Class L3="Ceramic Capacitors", Digikey Description="CAP CER 1UF 25V X7R 0805", Footprint Url=http://www.yageo.com/exep/pages/download/literatures/UPY-C_GEN_24.pdf, Height=0.95mm, Ipc Land Pattern Name=CAPC200125X85, Lead Free=Yes, Material=Ceramic, Mouser Description="Multilayer Ceramic Capacitor, CC Series, 1 - F, - 10%, X7R, 25 V, 0805 [2012 Metric]", Octopart=https://octopart.com/cc0805kkx7r8bb105-yageo-42244645, RoHS=TRUE
C8 C9: library part CMP-2007-01790-1, Manufacturer=Vitramon, Part Number=VJ0805Y222JXAAC
C14 C15 C16: library part CMP-2100-03600-2, "CAP CER 10000PF 50V X7R 0603", Capacitance="10 nF", Manufacturer=YAGEO, Manufacturer Part Number=CC0603KRX7R9BB103, Package=CC0603-DA, Temperature="-55°C to +125°C", Temperature Characteristic=X7R, Temperature Coefficient=15%, Temperature Range High=+125°C, Temperature Range Low=-55°C, Tolerance=0.1, Voltage="50 V", Automotive=No, Category=Cap, ComponentLink2Description=Datasheet, ComponentLink2URL=http://www.yageo.com/documents/recent/UPY-GPHC_X7R_6.3V-to-50V_18.pdf, Device Class L1="Passive Components", Device Class L2=Capacitors, Device Class L3="Ceramic Capacitors", Digikey Description="CAP CER 10000PF 50V X7R 0603", Footprint Url=http://www.yageo.com/exep/pages/download/literatures/UPY-C_GEN_24.pdf, Height=0.9mm, Lead Free=Yes, Material=Ceramic, Mouser Description="Multilayer Ceramic Capacitor, CC Series, 0.01 - F, - 10%, X7R, 50 V, 0603 [1608 Metric]", Octopart=https://octopart.com/cc0603krx7r9bb103-yageo-192938, RoHS=TRUE, Voltage Rating="50 V"
C17 C18: library part CMP-2006-02592-1, Manufacturer=Murata, Part Number=GRM1885C1H100JA01D
C23: library part CMP-06035-004324-1, "Chip Multilayer Ceramic Capacitors for General Purpose, 0805, 4.7uF, X7R, 15%, 10%, 16V", Capacitance=4.7uF, Case/Package=0805, Dielectric=X7R, Tolerance=10%, Voltage Rating (DC)=16V, Length=2mm, Thickness=1.25mm, Width=1.25mm
D1: "Diode TVS Single Uni-Directional 22V 600W 2-Pin DO-214AA", Breakdown Voltage=25.7V, Clamping Voltage=35.5V, Forward Voltage=1V, Manufacturer="Taiwan Semiconductor", Manufacturer Lifecycle Status=ACTIVE, Max Breakdown Voltage=26.9V, Max Forward Surge Current (Ifsm)=2.5A, Max Junction Temperature (Tj)=150°C, Max Power Dissipation=3W, Max Repetitive Reverse Voltage (Vrrm)=250V, Max Reverse Leakage Current=1µA, Max Surge Current=100A, Min Breakdown Voltage=24.4V, Min Operating Temperature=-55°C, Operating Supply Voltage=22V, Peak Pulse Current=17.7A, Peak Pulse Power=600W, Power Dissipation=200mW, Supplier Part Number=8022308, Category="TVS Diodes", China RoHS=Non-Compliant, ComponentLink1Description=https://datasheet.octopart.com:443/SMBJ22A-Taiwan-Semiconductor-datasheet-151942224.pdf?src-supplier=TME, ComponentLink1URL=https://datasheet.octopart.com:443/SMBJ22A-Taiwan-Semiconductor-datasheet-151942224.pdf?src-supplier=TME, ComponentLink2Description=https://datasheet.octopart.com:443/SMBJ22A-Taiwan-Semiconductor-datasheet-181551140.pdf?src-supplier=IHS, ComponentLink2URL=https://datasheet.octopart.com:443/SMBJ22A-Taiwan-Semiconductor-datasheet-181551140.pdf?src-supplier=IHS, ComponentLink3Description=https://datasheet.octopart.com:443/SMBJ22A-Taiwan-Semiconductor-datasheet-182396145.pdf?src-supplier=IHS, ComponentLink3URL=https://datasheet.octopart.com:443/SMBJ22A-Taiwan-Semiconductor-datasheet-182396145.pdf?src-supplier=IHS, ComponentLink4Description=https://datasheet.octopart.com:443/SMBJ22A-Taiwan-Semiconductor-datasheet-180789127.pdf?src-supplier=IHS, ComponentLink4URL=https://datasheet.octopart.com:443/SMBJ22A-Taiwan-Semiconductor-datasheet-180789127.pdf?src-supplier=IHS, ComponentLink5Description=https://datasheet.octopart.com:443/SMBJ22A-Taiwan-Semiconductor-datasheet-137249696.pdf?src-supplier=Taiwan+Semiconductor, ComponentLink5URL=https://datasheet.octopart.com:443/SMBJ22A-Taiwan-Semiconductor-datasheet-137249696.pdf?src-supplier=Taiwan+Semiconductor, ComponentLink6Description=https://datasheet.octopart.com:443/SMBJ22A-Taiwan-Semiconductor-datasheet-34355353.pdf?src-supplier=Taiwan+Semiconductor, ComponentLink6URL=https://datasheet.octopart.com:443/SMBJ22A-Taiwan-Semiconductor-datasheet-34355353.pdf?src-supplier=Taiwan+Semiconductor, ComponentLink7Description=https://datasheet.octopart.com:443/SMBJ22A-Taiwan-Semiconductor-datasheet-94061883.pdf?src-supplier=Newark, ComponentLink7URL=https://datasheet.octopart.com:443/SMBJ22A-Taiwan-Semiconductor-datasheet-94061883.pdf?src-supplier=Newark, Country of Origin="Mainland China, Taiwan", Export Control Classification Number (ECCN) Code=EAR99, Harmonized Tariff Schedule (HTS) Code=8541.10.00.50, Height=2.44mm, Introduction Date=1998-01-21, Lead Free="Lead Free", Length=5.59mm, Lifecycle Status=Production, Manufacturer Part Number=SMBJ22A, Max Operating Temperature=150°C, Number of Channels=1, Number of Elements=1, Number of Terminals=2, Peak Reverse Current=1µA, Pins=2, Polarity=Unidirectional, Power Rating=600W, REACH SVHC=No, Reverse Recovery Time=50ns, Reverse Standoff Voltage=22V, RoHS=Compliant, Schedule B=8541100080, Stock=500, Supplier=RS, Voltage Rating (DC)=22V, Width=3.94mm
D2: library part CMP-2000-07370-2, "TVS DIODE 5.25V 17V SOT23-6", Breakdown Voltage=6V, Capacitance=3pF, Clamping Voltage=17V, Manufacturer=STMicroelectronics, Max Junction Temp=+125°C, Package=SOT23-6L, Peak Pulse Power=130W, Temperature="-40°C to +125°C", Temperature Range Low=-40°C, Automotive=No, Category=Diode, ComponentLink2Description=Datasheet, ComponentLink2URL=https://upverter.com/datasheet/23dc4ffb028d868909e80577610284b194f13213.pdf, Device Class L1="Circuit Protection", Device Class L2="ESD and Circuit Protection ICs", Device Class L3=unset, Digikey Description="TVS DIODE 5.25V 17V SOT23-6", Direction=Unidirectional, Height=1.45mm, Interface=USB,Ethernet,Other, Lead Free=Yes, Manufacturer Part Number=USBLC6-4SC6, Mouser Description="USBLC6 Series 4 Line 6 V Uni / Bi-Directional ESD Protection - SOT-23-6", Number of Channels=4, Octopart=https://octopart.com/usblc6-4sc6-stmicroelectronics-347147, RoHS=TRUE, Standoff Height=0mm, Temperature Range High=+125°C
D3: "TVS DIODE 25.5VWM 43VC SOT323-3 / 43V Clamp 3.7A (8/20µs) Ipp Tvs Diode Surface Mount SOT-323-3", Breakdown Voltage=29.1V, Clamping Voltage=43V, Manufacturer=STMicroelectronics, Max Breakdown Voltage=30.7V, Max Operating Temperature=175°C, Min Breakdown Voltage=27.5V, Min Operating Temperature=-55°C, Peak Pulse Power=170W, Peak Reverse Current=50nA, Ratings=AEC-Q101, Reverse Standoff Voltage=25.5V, Supplier Part Number=1924255, Category="TVS Diodes", China RoHS=Compliant, ComponentLink1Description=https://datasheet.octopart.com:443/ESDCAN04-2BWY-STMicroelectronics-datasheet-166055823.pdf?src-supplier=Newark, ComponentLink1URL=https://datasheet.octopart.com:443/ESDCAN04-2BWY-STMicroelectronics-datasheet-166055823.pdf?src-supplier=Newark, Country of Origin="Mainland China", Export Control Classification Number (ECCN) Code=EAR99, Harmonized Tariff Schedule (HTS) Code=8541.10.00.50, Introduction Date=2018-11-14, Lifecycle Status=Production, Manufacturer Part Number=ESDCAN04-2BWY, Number of Channels=2, Number of Elements=2, Number of Terminals=3, Polarity=Bidirectional, REACH SVHC=Yes, RoHS=Compliant, Schedule B="8536300000, 8536300000|8536300000|8536300000|8536300000|8536300000", Stock=5375, Supplier=RS
D4: "SM712 Series 31 V 600 W Surface Mount Asymmetrical TVS Diode Array - SOT-23-3", Breakdown Voltage=13.3V, Case/Package=SOT-23-3, Clamping Voltage=31V, Leakage Current=1µA, Manufacturer=Littelfuse, Max Operating Temperature=125°C, Max Power Dissipation=600W, Max Surge Current=19A, Min Breakdown Voltage=7.5V, Min Operating Temperature=-40°C, Operating Supply Voltage=12V, Peak Reverse Current=20µA, Power Line Protection=No, Ratings=AEC-Q101, Reverse Standoff Voltage=7V, Category="TVS Diodes", ComponentLink1Description=https://datasheet.octopart.com:443/SM712-02HTG-Littelfuse-datasheet-141011933.pdf?src-supplier=element14+APAC, ComponentLink1URL=https://datasheet.octopart.com:443/SM712-02HTG-Littelfuse-datasheet-141011933.pdf?src-supplier=element14+APAC, ComponentLink2Description=https://datasheet.octopart.com:443/SM712-02HTG-Littelfuse-datasheet-32866228.pdf?src-supplier=Upverter, ComponentLink2URL=https://datasheet.octopart.com:443/SM712-02HTG-Littelfuse-datasheet-32866228.pdf?src-supplier=Upverter, ComponentLink3Description=https://datasheet.octopart.com:443/SM712-02HTG-Littelfuse-datasheet-82522105.pdf?src-supplier=TME, ComponentLink3URL=https://datasheet.octopart.com:443/SM712-02HTG-Littelfuse-datasheet-82522105.pdf?src-supplier=TME, ComponentLink4Description=https://datasheet.octopart.com:443/SM712-02HTG-Littelfuse-datasheet-175469618.pdf?src-supplier=JRH+Electronics, ComponentLink4URL=https://datasheet.octopart.com:443/SM712-02HTG-Littelfuse-datasheet-175469618.pdf?src-supplier=JRH+Electronics, Composition=Zener, Country of Origin="Mainland China", Depth=1.4mm, Direction=Bidirectional, Element Configuration=Dual, Export Control Classification Number (ECCN) Code=EAR99, Harmonized Tariff Schedule (HTS) Code=8541.10.00.50, Height=1.12mm, Introduction Date=2014-06-09, Lead Free="Lead Free", Length=3.04mm, Lifecycle Status=Production, Manufacturer Part Number=SM712-02HTG, Mounting Technology="Surface Mount", Number of Bidirectional Channels=2, Number of Channels=2, Number of Elements=2, Number of Terminals=3, Peak Pulse Current=19A, Peak Pulse Power=600W, Pins=3, Polarity=Unidirectional, Radiation Hardening=No, REACH SVHC=Yes, RoHS=Compliant, Schedule B="8536300000, 8536300000|8536300000|8536300000|8536300000|8536300000|8536300000|8536300000|8536300000|8536300000|8536300000|8536300000|8536300000|8536300000|8536300000|8536300000|8536300000|8536300000|8536300000|8536300000|8536300000|8536300000|8536300000|8536300000|85", Stock=30901, Supplier=Farnell, Supplier Part Number=SM712-02HTG, Termination=SMD/SMT, Working Voltage=12V
D5 D6 D7 D8 D9 D10: library part CMP-44529-000017-1, "LED GREEN CLEAR CHIP SMD", Case Code (Imperial)=0805, Case Code (Metric)=2012, Color=Green, Forward Current=20mA, Forward Voltage=2.1V, Lens Color=Colorless, Max Operating Temperature=85°C, Min Operating Temperature=-40°C, Package Quantity=2000, Power Rating=75mW, Case/Package=0805, Dominant Wavelength=570nm, Height=0.75mm, Illumination Color=Green, Lead Free="Lead Free", Length=2mm, Lens Style=Clear, Lens Transparency=Clear, Luminous Intensity=70mcd, Mount="Surface Mount", Packaging="Tape and Reel", Test Current=20mA, Viewing Angle=120°, Width=1.25mm
F1: "1206L Series 24 V 500 mA 1206 SMT Polymeric PTC Resettable Fuse", Hold Current=500mA, Manufacturer=Littelfuse, Max Current Rating=100A, Max Operating Temperature=85°C, Maximum Resistance 1 Hour (R1max)=750mΩ, Min Operating Temperature=-40°C, Minimum Resistance Initial (Rmin)=150mΩ, Power Dissipation=600mW, Ratings=TUV, Trip Current=1A, Working Voltage=24V, Category="PTC Resettable Fuses", ComponentLink1Description=https://datasheet.octopart.com:443/1206L050-24WR-Littelfuse-datasheet-181956355.pdf?src-supplier=IHS, ComponentLink1URL=https://datasheet.octopart.com:443/1206L050-24WR-Littelfuse-datasheet-181956355.pdf?src-supplier=IHS, ComponentLink2Description=https://datasheet.octopart.com:443/1206L050-24WR-Littelfuse-datasheet-165518606.pdf?src-supplier=Newark, ComponentLink2URL=https://datasheet.octopart.com:443/1206L050-24WR-Littelfuse-datasheet-165518606.pdf?src-supplier=Newark, ComponentLink3Description=https://datasheet.octopart.com:443/1206L050-24WR-Littelfuse-datasheet-130008768.pdf?src-supplier=ODG+(Origin+Data+Global), ComponentLink3URL=https://datasheet.octopart.com:443/1206L050-24WR-Littelfuse-datasheet-130008768.pdf?src-supplier=ODG+(Origin+Data+Global), ComponentLink4Description=https://datasheet.octopart.com:443/1206L050-24WR-Littelfuse-datasheet-183575726.pdf?src-supplier=Sager+Electronics, ComponentLink4URL=https://datasheet.octopart.com:443/1206L050-24WR-Littelfuse-datasheet-183575726.pdf?src-supplier=Sager+Electronics, ComponentLink5Description=https://datasheet.octopart.com:443/1206L050-24WR-Littelfuse-datasheet-176144932.pdf?src-supplier=Sager+Electronics, ComponentLink5URL=https://datasheet.octopart.com:443/1206L050-24WR-Littelfuse-datasheet-176144932.pdf?src-supplier=Sager+Electronics, ComponentLink6Description=https://datasheet.octopart.com:443/1206L050-24WR-Littelfuse-datasheet-178296428.pdf?src-supplier=Burklin+Elektronik, ComponentLink6URL=https://datasheet.octopart.com:443/1206L050-24WR-Littelfuse-datasheet-178296428.pdf?src-supplier=Burklin+Elektronik, ComponentLink7Description=https://datasheet.octopart.com:443/1206L050-24WR-Littelfuse-datasheet-170674161.pdf?src-supplier=Future+Electronics, ComponentLink7URL=https://datasheet.octopart.com:443/1206L050-24WR-Littelfuse-datasheet-170674161.pdf?src-supplier=Future+Electronics, ComponentLink8Description=https://datasheet.octopart.com:443/1206L050-24WR-Littelfuse-datasheet-26530142.pdf?src-supplier=Fuses+Unlimited, ComponentLink8URL=https://datasheet.octopart.com:443/1206L050-24WR-Littelfuse-datasheet-26530142.pdf?src-supplier=Fuses+Unlimited, Height=1.25mm, Length=3.4mm, Lifecycle Status=Production, Manufacturer Part Number=1206L050/24WR, Mounting Technology="Surface Mount", Number of Terminals=2, REACH SVHC=Yes, RoHS=Compliant, Stock=540, Supplier=Farnell, Supplier 1=Farnell, Supplier Part Number=1206L050/24WR, Supplier Part Number 1=1206L050/24WR, Width=1.8mm
FB1 FB2: library part CMP-08257-000179-1, "Power line Ferrite Bead 600Ω @ 100MHz 1A DCR 0.15Ω SMD 0603", Case Code (Imperial)=0603, Case Code (Metric)=1608, Current Rating=1A, DC Resistance (DCR)=150mR, Max Operating Temperature=125°C, Min Operating Temperature=-55°C, Package Quantity=4000, Test Frequency=100MHz, Tolerance=25%, Case/Package=0603, Core Material=Ferrite, Depth=0.8mm, Height=0.8mm, Impedance=600R, Lead Free="Lead Free", Length=0.063inch, Max DC Current=1A, Mount="Surface Mount", Packaging="Tape and Reel", REACH SVHC="No SVHC", RoHS Compliant=Yes, Series=MPZ, Termination=SMD/SMT, Weight=7.1E-05oz, Width=0.8mm
J1: "Socket; DC supply; XT30; female; PIN:2; on PCBs; THT; Colour: yellow", Manufacturer_Name=Amass, Datasheet Link=https://www.tme.eu/Document/ce4077e36b79046da520ca73227e15de/XT30PW%20SPEC.pdf, Geometry.Height=5mm, Manufacturer_Part_Number=XT30PW-F
J2: "Molex Connector 2x2 4.2mm Solder Right Angle Thru-Hole Tray", Color=Natural, Contact Resistance=10mΩ, Current Rating=9A, Flammability Rating="UL94 V-2", Insulation Resistance=1GΩ, Manufacturer=Molex, Manufacturer Lifecycle Status=ACTIVE, Max Operating Temperature=105°C, Min Operating Temperature=-40°C, Ratings="CSA, TUV", Supplier Part Number=WM1352-ND, Voltage Rating=600V, Approvals="CSA, TUV, UL", Category="Headers and Wire Housings", China RoHS=Compliant, ComponentLink1Description=https://datasheet.octopart.com:443/39-30-1040-Molex-datasheet-138897372.pdf?src-supplier=Upverter, ComponentLink1URL=https://datasheet.octopart.com:443/39-30-1040-Molex-datasheet-138897372.pdf?src-supplier=Upverter, ComponentLink2Description=https://datasheet.octopart.com:443/039301040-Molex-datasheet-8338717.pdf?src-supplier=Upverter, ComponentLink2URL=https://datasheet.octopart.com:443/039301040-Molex-datasheet-8338717.pdf?src-supplier=Upverter, ComponentLink3Description=https://sigma.octopart.com:443/120074128/technical_drawing/Molex-39-30-1040.pdf?src-supplier=IHS, ComponentLink3URL=https://sigma.octopart.com:443/120074128/technical_drawing/Molex-39-30-1040.pdf?src-supplier=IHS, ComponentLink4Description=https://datasheet.octopart.com:443/39-30-1040-Molex-datasheet-12525736.pdf?src-supplier=Molex, ComponentLink4URL=https://datasheet.octopart.com:443/39-30-1040-Molex-datasheet-12525736.pdf?src-supplier=Molex, ComponentLink5Description=https://sigma.octopart.com:443/15644801/technical_drawing/Molex-39-30-1040.pdf?src-supplier=Molex, ComponentLink5URL=https://sigma.octopart.com:443/15644801/technical_drawing/Molex-39-30-1040.pdf?src-supplier=Molex, ComponentLink6Description=https://datasheet.octopart.com:443/39-30-1040-Molex-datasheet-193097287.pdf?src-supplier=JRH+Electronics, ComponentLink6URL=https://datasheet.octopart.com:443/39-30-1040-Molex-datasheet-193097287.pdf?src-supplier=JRH+Electronics, ComponentLink7Description=https://datasheet.octopart.com:443/39-30-1040-Molex-datasheet-154749335.pdf?src-supplier=Master+Electronics, ComponentLink7URL=https://datasheet.octopart.com:443/39-30-1040-Molex-datasheet-154749335.pdf?src-supplier=Master+Electronics, ComponentLink8Description=https://datasheet.octopart.com:443/39-30-1040-Molex-datasheet-101582408.pdf?src-supplier=Farnell, ComponentLink8URL=https://datasheet.octopart.com:443/39-30-1040-Molex-datasheet-101582408.pdf?src-supplier=Farnell, ComponentLink9Description=https://datasheet.octopart.com:443/39-30-1040-Molex-datasheet-13726788.pdf?src-supplier=Farnell, ComponentLink9URL=https://datasheet.octopart.com:443/39-30-1040-Molex-datasheet-13726788.pdf?src-supplier=Farnell, ComponentLink10Description=https://datasheet.octopart.com:443/39-30-1040-Molex-datasheet-8451564.pdf?src-supplier=Farnell, ComponentLink10URL=https://datasheet.octopart.com:443/39-30-1040-Molex-datasheet-8451564.pdf?src-supplier=Farnell, ComponentLink11Description=https://datasheet.octopart.com:443/39-30-1040-Molex-datasheet-8377082.pdf?src-supplier=Farnell, ComponentLink11URL=https://datasheet.octopart.com:443/39-30-1040-Molex-datasheet-8377082.pdf?src-supplier=Farnell, ComponentLink12Description=https://datasheet.octopart.com:443/39-30-1040-Molex-datasheet-8338264.pdf?src-supplier=Farnell, ComponentLink12URL=https://datasheet.octopart.com:443/39-30-1040-Molex-datasheet-8338264.pdf?src-supplier=Farnell, ComponentLink13Description=https://datasheet.octopart.com:443/39-30-1040-Molex-datasheet-21539009.pdf?src-supplier=Electro+Sonic, ComponentLink13URL=https://datasheet.octopart.com:443/39-30-1040-Molex-datasheet-21539009.pdf?src-supplier=Electro+Sonic, ComponentLink14Description=https://datasheet.octopart.com:443/39-30-1040-Molex-datasheet-62104196.pdf?src-supplier=Electro+Sonic, ComponentLink14URL=https://datasheet.octopart.com:443/39-30-1040-Molex-datasheet-62104196.pdf?src-supplier=Electro+Sonic, ComponentLink15Description=https://datasheet.octopart.com:443/39-30-1040-Molex-datasheet-37170052.pdf?src-supplier=Electro+Sonic, ComponentLink15URL=https://datasheet.octopart.com:443/39-30-1040-Molex-datasheet-37170052.pdf?src-supplier=Electro+Sonic, ComponentLink16Description=https://datasheet.octopart.com:443/39-30-1040-Molex-datasheet-140183172.pdf?src-supplier=RS+(Formerly+Allied+Electronics), ComponentLink16URL=https://datasheet.octopart.com:443/39-30-1040-Molex-datasheet-140183172.pdf?src-supplier=RS+(Formerly+Allied+Electronics), ComponentLink17Description=https://datasheet.octopart.com:443/39-30-1040-Molex-datasheet-120148725.pdf?src-supplier=RS+(Formerly+Allied+Electronics), ComponentLink17URL=https://datasheet.octopart.com:443/39-30-1040-Molex-datasheet-120148725.pdf?src-supplier=RS+(Formerly+Allied+Electronics), ComponentLink18Description=https://datasheet.octopart.com:443/39-30-1040-Molex-datasheet-34442213.pdf?src-supplier=RS+(Formerly+Allied+Electronics), ComponentLink18URL=https://datasheet.octopart.com:443/39-30-1040-Molex-datasheet-34442213.pdf?src-supplier=RS+(Formerly+Allied+Electronics), ComponentLink19Description=https://datasheet.octopart.com:443/39-30-1040-Molex-datasheet-9746676.pdf?src-supplier=RS+(Formerly+Allied+Electronics), ComponentLink19URL=https://datasheet.octopart.com:443/39-30-1040-Molex-datasheet-9746676.pdf?src-supplier=RS+(Formerly+Allied+Electronics), ComponentLink20Description=https://datasheet.octopart.com:443/39-30-1040-Molex-datasheet-156091076.pdf?src-supplier=Jameco, ComponentLink20URL=https://datasheet.octopart.com:443/39-30-1040-Molex-datasheet-156091076.pdf?src-supplier=Jameco, ComponentLink21Description=https://datasheet.octopart.com:443/39301040-Molex-datasheet-7831653.pdf?src-supplier=Jameco, ComponentLink21URL=https://datasheet.octopart.com:443/39301040-Molex-datasheet-7831653.pdf?src-supplier=Jameco, ComponentLink22Description=https://datasheet.octopart.com:443/39-30-1040-Molex-datasheet-7265007.pdf?src-supplier=Jameco, ComponentLink22URL=https://datasheet.octopart.com:443/39-30-1040-Molex-datasheet-7265007.pdf?src-supplier=Jameco, ComponentLink23Description=https://datasheet.octopart.com:443/39-30-1040-Molex-datasheet-33002872.pdf?src-supplier=Newark, ComponentLink23URL=https://datasheet.octopart.com:443/39-30-1040-Molex-datasheet-33002872.pdf?src-supplier=Newark, ComponentLink24Description=https://datasheet.octopart.com:443/39-30-1040-Molex-datasheet-21207484.pdf?src-supplier=Newark, ComponentLink24URL=https://datasheet.octopart.com:443/39-30-1040-Molex-datasheet-21207484.pdf?src-supplier=Newark, ComponentLink25Description=https://datasheet.octopart.com:443/39-30-1040-Molex-datasheet-2405.pdf?src-supplier=Newark, ComponentLink25URL=https://datasheet.octopart.com:443/39-30-1040-Molex-datasheet-2405.pdf?src-supplier=Newark, ComponentLink26Description=https://datasheet.octopart.com:443/39-30-1040-Molex-datasheet-21395541.pdf?src-supplier=TME, ComponentLink26URL=https://datasheet.octopart.com:443/39-30-1040-Molex-datasheet-21395541.pdf?src-supplier=TME, ComponentLink27Description=https://datasheet.octopart.com:443/39-30-1040-Molex-datasheet-134310.pdf?src-supplier=DigiKey, ComponentLink27URL=https://datasheet.octopart.com:443/39-30-1040-Molex-datasheet-134310.pdf?src-supplier=DigiKey, ComponentLink28Description=http://sigma.octopart.com:80/15645375/rohs_certificate/Molex-39-30-1040.pdf?src-supplier=Compliance+Statements, ComponentLink28URL=http://sigma.octopart.com:80/15645375/rohs_certificate/Molex-39-30-1040.pdf?src-supplier=Compliance+Statements, ComponentLink29Description=http://sigma.octopart.com:80/reach_statement/Molex-company-74.pdf?src-supplier=Compliance+Statements, ComponentLink29URL=http://sigma.octopart.com:80/reach_statement/Molex-company-74.pdf?src-supplier=Compliance+Statements, ComponentLink30Description=http://sigma.octopart.com:80/rohs_statement/Molex-company-73.pdf?src-supplier=Compliance+Statements, ComponentLink30URL=http://sigma.octopart.com:80/rohs_statement/Molex-company-73.pdf?src-supplier=Compliance+Statements, ComponentLink31Description=http://sigma.octopart.com:80/conflict_mineral_statement/Molex-company-72.pdf?src-supplier=Compliance+Statements, ComponentLink31URL=http://sigma.octopart.com:80/conflict_mineral_statement/Molex-company-72.pdf?src-supplier=Compliance+Statements, Connector Type="Power, Rectangular", Contact Gender=Male, Contact Material=Brass, Contact Plating=Tin, Country of Origin=US, Depth=19.79mm, ELV=Compliant, Export Control Classification Number (ECCN) Code=EAR99, Gender=Male, Glow Wire Compliant=Non-compliant, Halogen Free="Low Halogen", Harmonized Tariff Schedule (HTS) Code=8536.69.40.30, Height=13.38mm, Housing Material=Nylon, Introduction Date=1994-12-01, Lead Free="Lead Free", Lead Pitch=4.2mm, Length=21.08mm, Lifecycle Status=Production, Manufacturer Part Number=39-30-1040, Material=Nylon, Mounting Technology="PCB, Through Hole", Number of Circuits=3, Number of Contacts=4, Number of Poles=4, Number of Positions=4, Number of Rows=1, Orientation="Right Angle, Vertical", Packaging=Bulk, Pins=5, Pitch=4.2mm, Plating Thickness=2.54µm, Pricing="1=0,85, 10=0,72, 100=0,6122, 500=0,54636, 4000=0,47179, 8000=0,44928, 12000=0,43662 (USD)", Radiation Hardening=No, REACH SVHC=Yes, RoHS=Compliant, Row Spacing=4.2mm, Schedule B="8536694040, 8536694040|8536694040, 8536694040|8536694040|8536694040, 8536694040|8536694040|8536694040|8536694040", Stock=5632, Supplier=DigiKey, Termination=Solder, Voltage Rating (AC)=600V, Voltage Rating (DC)=600V, Working Voltage=600V
J3: "M12, A Code, 4A, 05 pins, Male Contact, Hexagonal, M12*1.0, PCB 90ø, Front Fastened, IP67", Current Rating=4A, Manufacturer="Amphenol LTW", Manufacturer_Name=Amphenol, Mouser Part Number=523-M12A05PMMRSF7003, Supplier Part Number=50AC2957, Voltage Rating=60V, Arrow Part Number=M12A-05PMMR-SF7003, Arrow Price/Stock=https://www.arrow.com/en/products/m12a-05pmmr-sf7003/amphenol?utm_currency=USD&region=nac, Category="Circular Connectors", ComponentLink1Description=https://datasheet.octopart.com:443/M12A-05PMMR-SF7003-Amphenol-datasheet-182346588.pdf?src-supplier=IHS, ComponentLink1URL=https://datasheet.octopart.com:443/M12A-05PMMR-SF7003-Amphenol-datasheet-182346588.pdf?src-supplier=IHS, ComponentLink2Description=https://datasheet.octopart.com:443/M12A-05PMMR-SF7003-Amphenol-LTW-datasheet-184719079.pdf?src-supplier=TME, ComponentLink2URL=https://datasheet.octopart.com:443/M12A-05PMMR-SF7003-Amphenol-LTW-datasheet-184719079.pdf?src-supplier=TME, ComponentLink3Description=https://datasheet.octopart.com:443/M12A-05PMMR-SF7003-Amphenol-LTW-datasheet-180194516.pdf?src-supplier=JRH+Electronics, ComponentLink3URL=https://datasheet.octopart.com:443/M12A-05PMMR-SF7003-Amphenol-LTW-datasheet-180194516.pdf?src-supplier=JRH+Electronics, Connector Type=Signal, Datasheet Link=https://amphenolltw.com/down.php?prod_files=605433, Gender=Male, Geometry.Height=15mm, Lifecycle Status=Production, Manufacturer Part Number=M12A-05PMMR-SF7003, Manufacturer_Part_Number=M12A-05PMMR-SF7003, Mouser Price/Stock=https://www.mouser.co.uk/ProductDetail/Amphenol-LTW/M12A-05PMMR-SF7003?qs=f9yNj16SXrIdWSE1H9dLLQ%3D%3D, Number of Positions=5, Pins=5, RoHS=Compliant, Stock=32, Supplier=Avnet